# Altium PCB Finale.PcbDoc
Units mm, origin at the board's own origin, x right, y up, seen from the top; angles counter-clockwise.
Board outline 81.58 x 68.2 mm, 5 copper layers (Top Layer, 5V Plane, 12V Plane, Ground Plane, Bottom Layer), stack 1.005 mm thick; 66 components, 84 nets, 266 pads, 55 vias.
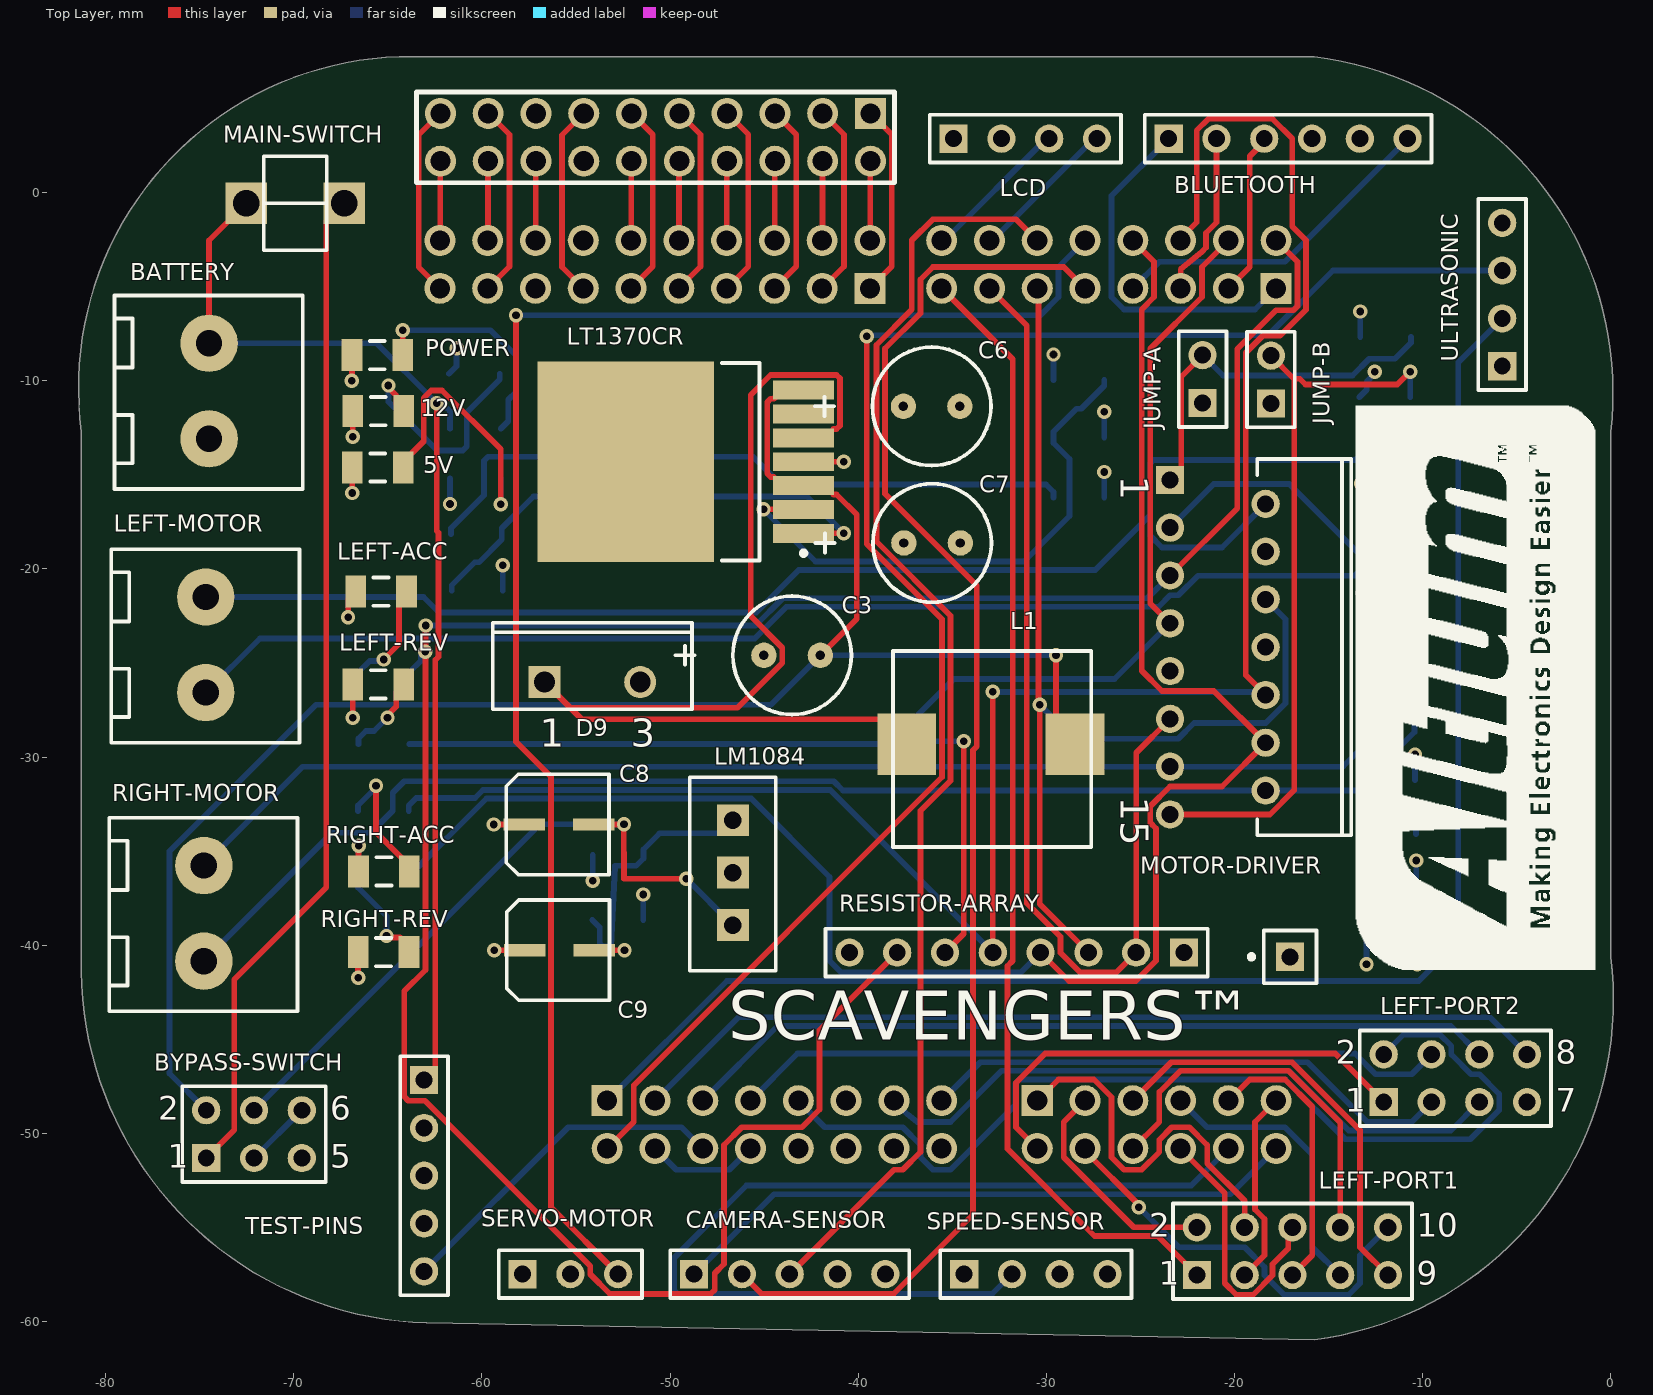
[diagram p0: Top Layer view]
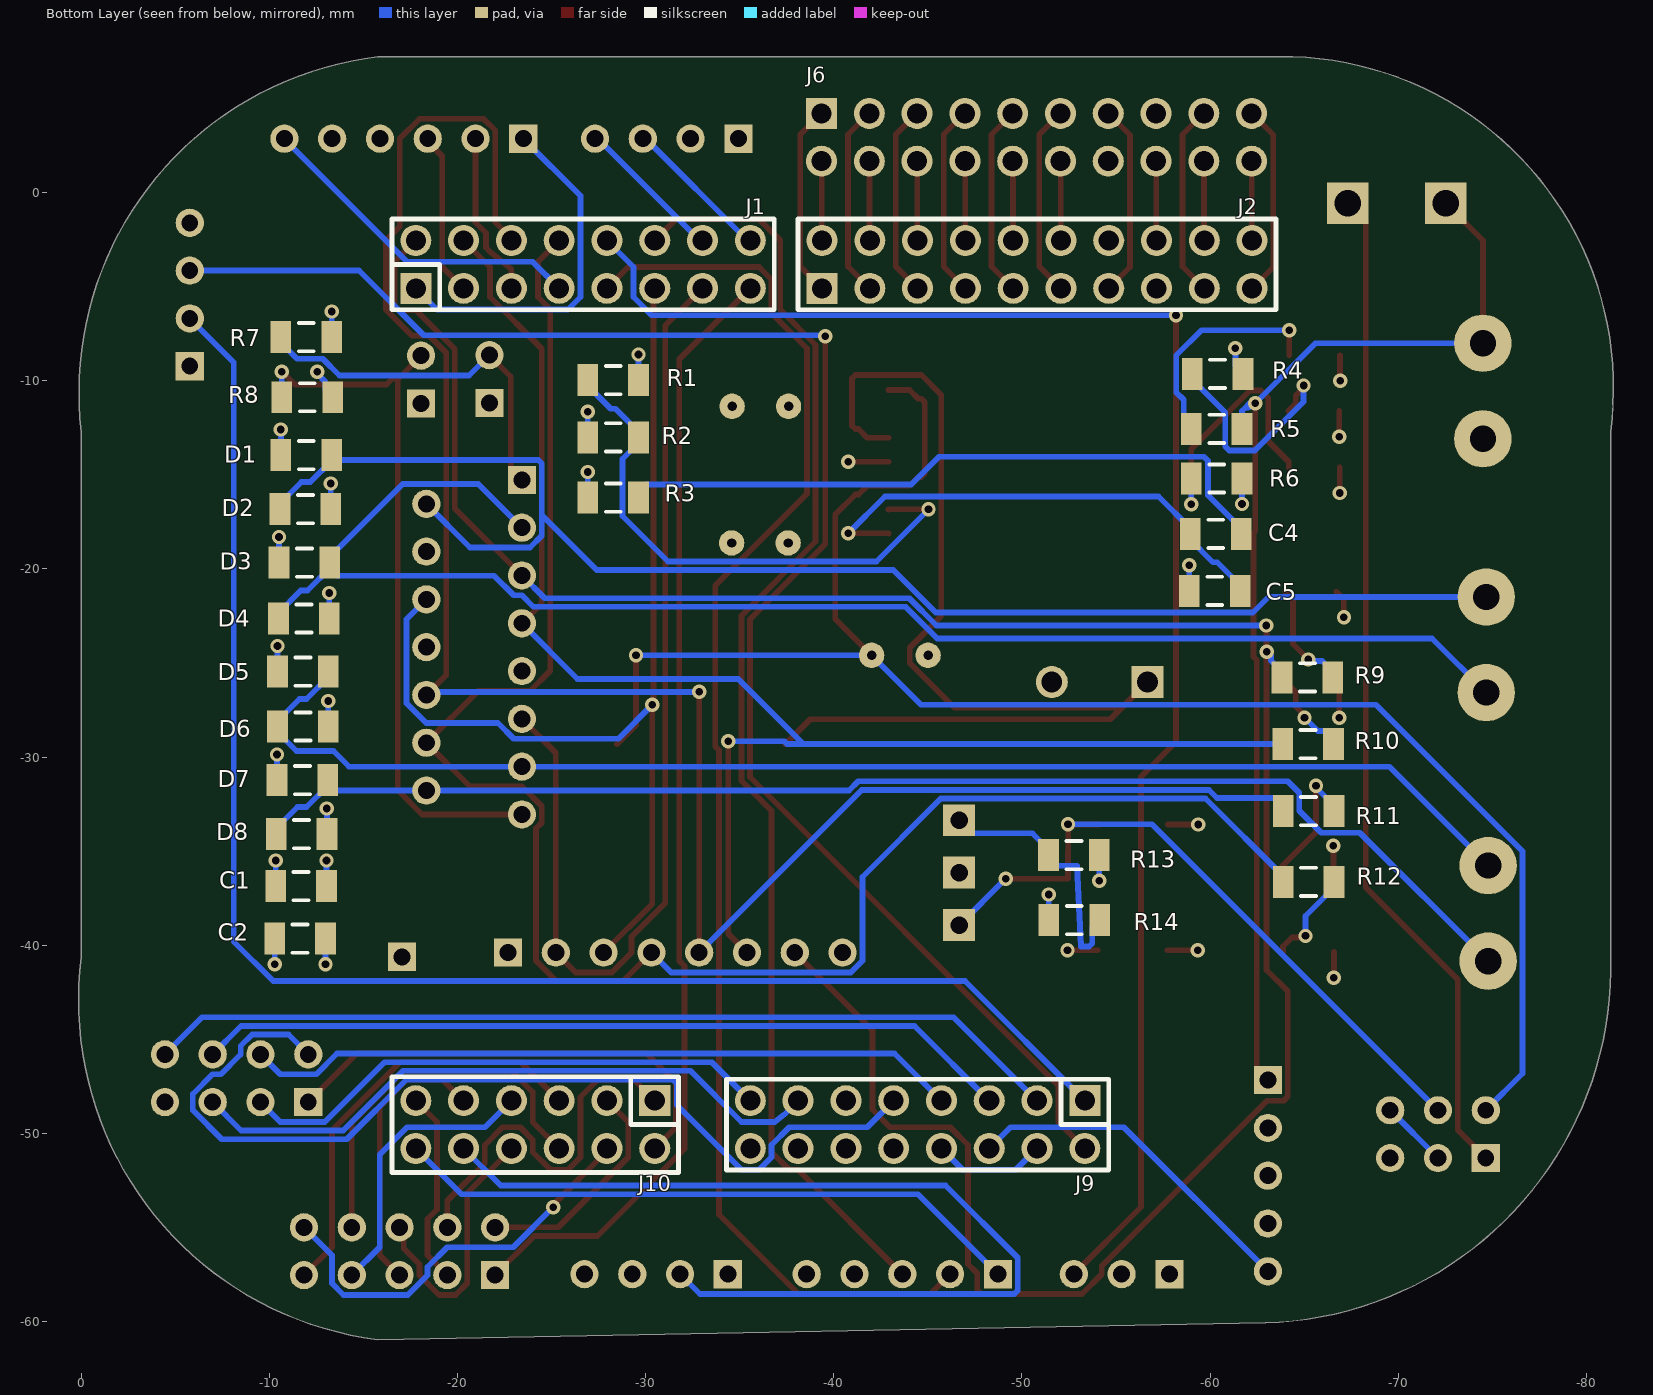
[diagram p1: Bottom Layer view, seen from below]
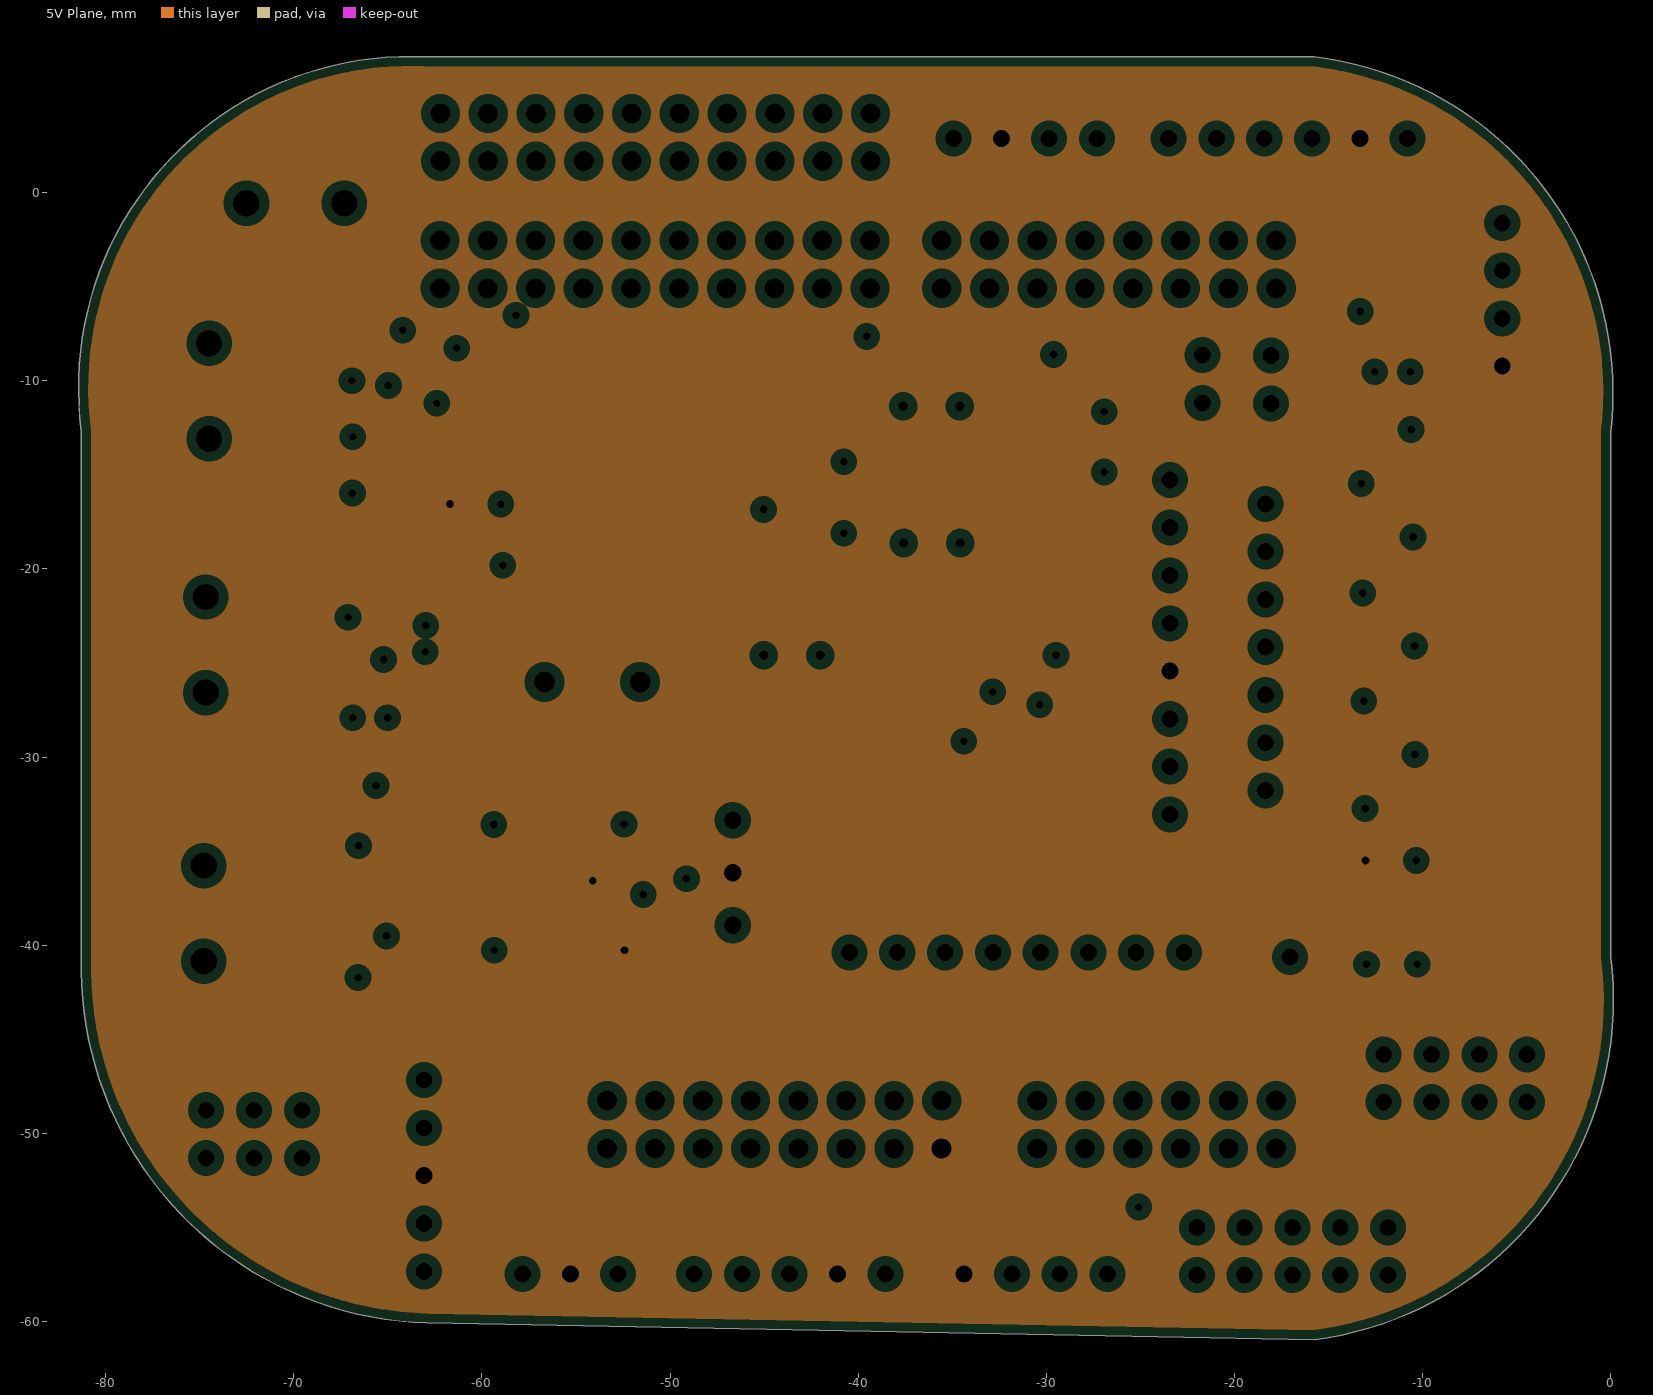
[diagram p2: 5V Plane, clearances drawn from the general rule]
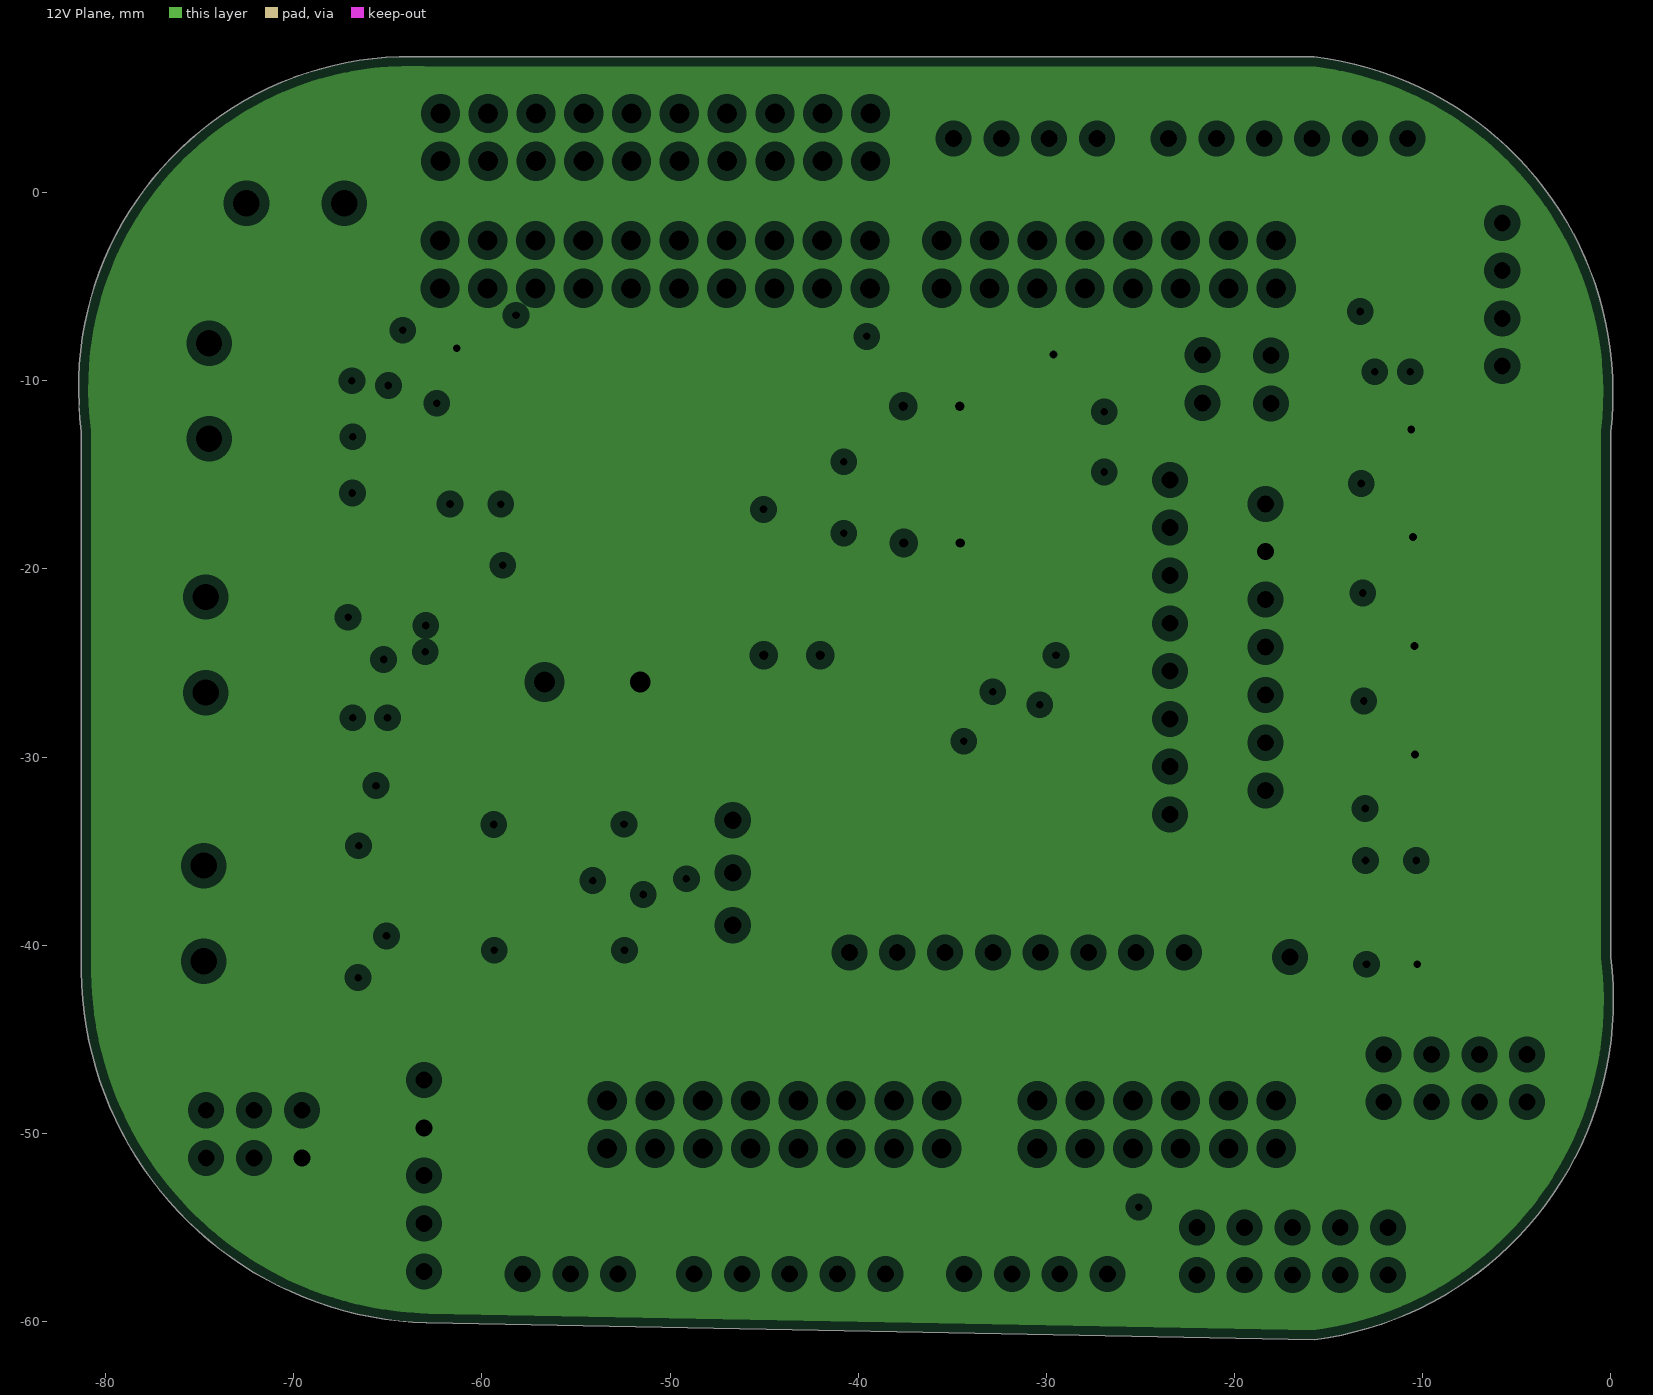
[diagram p3: 12V Plane, clearances drawn from the general rule]
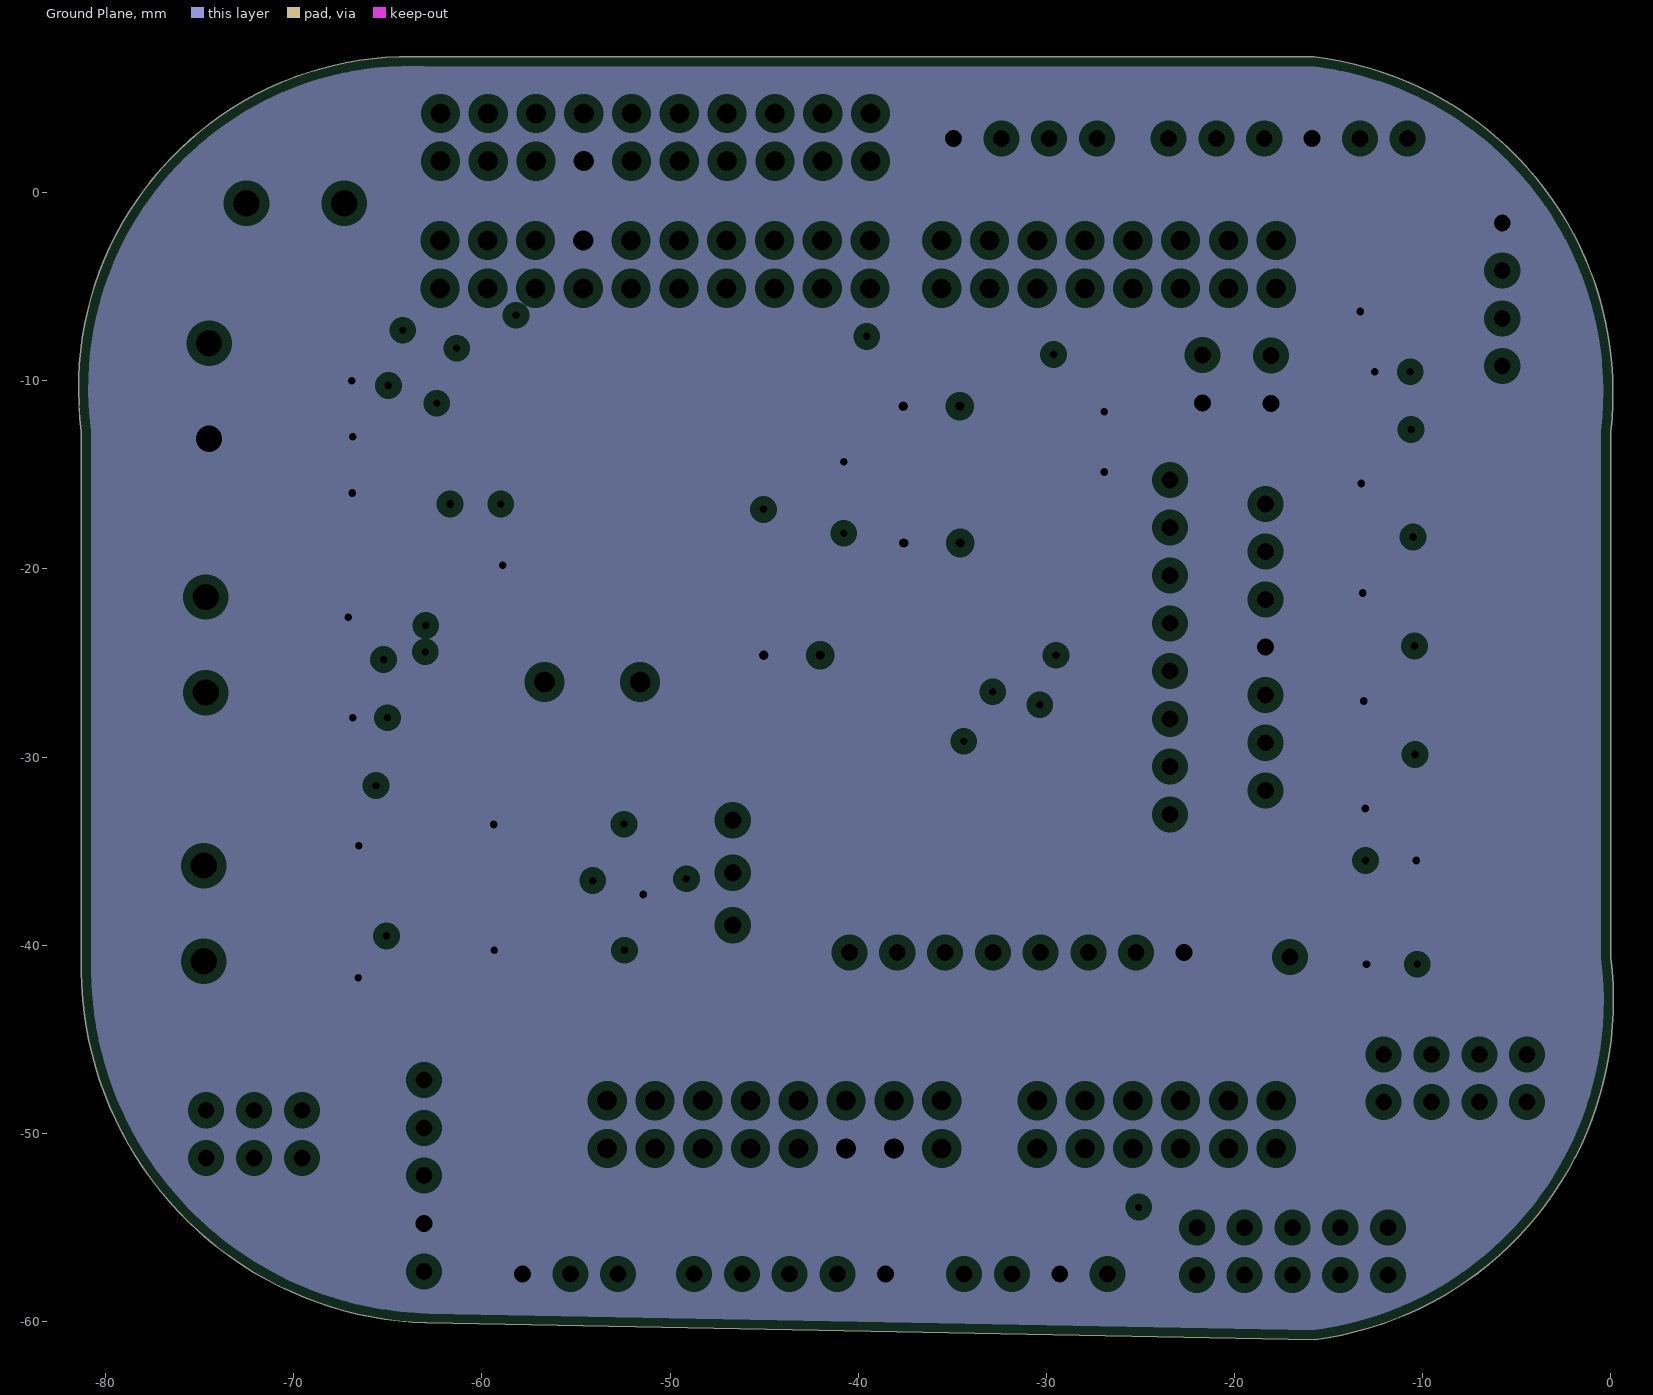
[diagram p4: Ground Plane, clearances drawn from the general rule]

## Layer stack, top to bottom
Top Solder: solder mask 0.0102, Solder Resist, Dk 3.5
Top Layer: signal copper 0.0356
Dielectric1: core 0.3175, FR-4, Dk 4.8
5V Plane: plane copper 0.036, net 5V
Dielectric 5: prepreg 0.127, Dk 4.2
12V Plane: plane copper 0.036, net 12V
Dielectric 6: core 0.254, Dk 4.2
Ground Plane: plane copper 0.036, net GND
Dielectric 4: prepreg 0.127, Dk 4.2
Bottom Layer: signal copper 0.0356
Bottom Solder: solder mask 0.0102, Solder Resist, Dk 3.5

## Board outline
-81.28,-40.64 ccw(c-62.395,-41.186) -62.942,-60.071 -15.753,-60.96 ccw(c-18.036,-42.924) 0,-40.64 0,-12.7 ccw(c-17.833,-10.619) -15.753,7.214 -25.121,7.214 -44.094,7.214 -62.942,7.214 ccw(c-63.837,-10.363) -81.28,-12.7

## Design rules (kind name [scope] priority, off if disabled: settings)
Clearance Polygon [(InNet('GND') AND InPoly)] p1: gap=0.254 ignorepadtopadclearanceinfootprint=FALSE except(0: Arc-Hole Track-Hole SMDPad-Hole THPad-Hole Via-Hole Fill-Hole Poly-Hole Region-Hole Text-Hole)
Clearance [All] p2: gap=0.152 ignorepadtopadclearanceinfootprint=FALSE
ComponentClearance [All] p1: gap=0 collisioncheckmode=3 verticalgap=0 showdistances=FALSE
Height [All] p1: minheight=0 maxheight=38.1 prefheight=12.7
HoleSize [All] p1: absolutevalues=TRUE maxlimit=6.35 minlimit=0.381 maxpercent=80.000 minpercent=20.000
HoleToHoleClearance [All] p1: gap=0.051 allowstackedmicrovias=TRUE
MinimumAnnularRing [All] p1: minimumring=0.178
MinimumSolderMaskSliver [All] p1: minsoldermaskwidth=0.178
PlaneClearance [All] p1: clearance=0.508
PlaneConnect [All] p1: planeconnectstyle=Direct reliefexpansion=0.508 reliefentries=4 reliefconductorwidth=0.254 reliefairgap=0.254
PolygonConnect PolygonConnect_1 [IsVia] p1: connectstyle=Direct reliefconductorwidth=0.254 reliefentries=4 polygonreliefangle="90 Angle" airgapwidth=0.254
PolygonConnect [All] p2: connectstyle=Relief reliefconductorwidth=0.254 reliefentries=4 polygonreliefangle="90 Angle" airgapwidth=0.254
RoomDefinition FinalPCB_Motor [InComponentClass('FinalPCB_Motor')] p1: confinementstyle=ConfineIn formatcopy=TRUE lockcomponents=FALSE outline -81.915,-63.398 1.372,-63.398 1.372,9.703 -81.915,9.703
RoomDefinition DC-DC [InComponentClass('DC-DC')] p2: confinementstyle=ConfineIn formatcopy=TRUE lockcomponents=FALSE outline -81.915,-63.652 1.549,-63.652 1.549,9.83 -81.915,9.83
RoomDefinition Connectors [InComponentClass('Connectors')] p3: confinementstyle=ConfineIn formatcopy=TRUE lockcomponents=FALSE outline -82.88,-65.43 4.191,-65.43 4.191,10.084 -82.88,10.084
RoutingVias [All] p1: holewidth=0.406 width=0.762 viastyle="Through Hole" minholewidth=0.381 minwidth=0.762 maxholewidth=1.27 maxwidth=2.54
ShortCircuit ShortCircuit_1 [HasFootprint('4-40 X 250') vs HasFootprint('4-40 X 250')] p1: allowed=TRUE
ShortCircuit [All] p2: allowed=FALSE
SilkToSilkClearance [All] p1: silktosilkclearance=0
SilkToSolderMaskClearance SilkscreenOverComponentPads [IsPad] p1: minsilkscreentomaskgap=0 clearancetoexposedcopper=TRUE
SolderMaskExpansion [All] p1: expansion=0.127
Width [All] p1: maxlimit=1.27 minlimit=0.254 preferedwidth=0.305
20 further rules are at their usual default settings.

## Classes and differential pairs
component class FinalPCB_Motor: Bluetooth C1 C2 "Camera sensor" CAMERA-SENSOR D1 D2 D3 D4 D5 D6 D7 D8 JUMP-A JUMP-B JumpA LCD "Left Motor" LEFT-ACC LEFT-MOTOR LEFT-REV "Motor Driver" MOTOR-DRIVER R7 R8 R9 R10 R11 R12 RESISTOR-ARRAY "Right Motor" "RIGHT REV" RIGHT-ACC RIGHT-MOTOR RIGHT-REV SCAVENGERS™ "Servo Motor" SERVO-MOTOR SPEED-SENSOR "Test PINS" TEST-PINS ULTRASONIC
component class DC-DC: 5V 12V Battery "Bypass Switch" BYPASS-SWITCH C3 C4 C5 C6 C7 C8 C9 D9 L1 LM1084 LT1370CR MAIN-SWITCH POWER R1 R2 R3 R4 R5 R6 R13 R14
component class Connectors: J1 J2 J6 J8 J9 J10 J12 LEFT-PORT1 LEFT-PORT2 R18

## Components (designator, comment, footprint, x,y, rotation, side; value= is the part's Value field where it differs from the comment)
5V "" C1206 -65.532,-14.605 r180 top
12V "" C1206 -65.507,-11.608 r180 top
BATTERY "" 282857-2 -74.498,-8.001 r180 top
BLUETOOTH "" HDR1X6 -23.495,2.87 r0 top (schematic designator Bluetooth)
BYPASS-SWITCH "SW-DPDT" HDR2X3 -74.651,-51.308 r0 top
C1 "0.1uF" C1206 -11.68,-36.855 r180 bottom
C2 "0.1uF" C1206 -11.629,-39.649 r180 bottom
C3 "22uF" PolarizedCap_22uF -42.009,-24.587 r180 top
C4 "0.047uF" C1206 -60.296,-18.136 r0 bottom
C5 "0.0047uF" C1206 -60.245,-21.158 r180 bottom
C6 "22uF" PolarizedCap_22uF -34.592,-11.354 r180 top
C7 "" PolarizedCap_22uF -34.567,-18.618 r180 top value=22uF
C8 "10uF" 10uF -55.905,-33.579 r180 top
C9 "10uF" 10uF -55.88,-40.259 r180 top
CAMERA-SENSOR "" HDR1X5 -48.717,-57.48 r0 top
D1 "" C1206 -11.96,-13.945 r0 bottom
D2 "" C1206 -11.913,-16.815 r0 bottom
D3 "" C1206 -11.858,-19.66 r0 bottom
D4 "" C1206 -11.833,-22.631 r0 bottom
D5 "" c1206 -11.782,-25.451 r0 bottom
D6 "" c1206 -11.782,-28.372 r0 bottom
D7 "" C1206 -11.756,-31.217 r0 bottom
D8 "" c1206 -11.706,-34.087 r0 bottom
D9 "" TO-220AC -54.127,-26.01 r0 top
J1 "67996-416HLF" 67996-416HLF -26.67,-3.81 r180 bottom locked
J2 "67996-420HLF" 67996-420HLF#1 -50.8,-3.81 r180 bottom locked
J6 "67996-420HLF" 67996-420HLF#2 -50.775,2.946 r0 bottom
J9 "67996-416HLF" 67996-416HLF -44.45,-49.53 r0 bottom locked
J10 "67996-412HLF" 67996-412HLF -24.13,-49.53 r0 bottom locked
JUMP-A "" HDR1X2 -21.692,-11.176 r90 top
JUMP-B "" HDR1X2 -18.059,-11.201 r90 top
L1 "10uH, 6.8A" Inductor10uH -32.944,-29.312 r180 top
LCD "" HDR1X4 -34.925,2.87 r0 top
LEFT-ACC "" C1206 -65.354,-21.209 r180 top
LEFT-MOTOR "" 282857-2 -74.676,-21.488 r180 top
LEFT-PORT1 "" HDR2X5 -21.996,-57.531 r0 top
LEFT-PORT2 "" HDR2X4 -12.065,-48.336 r0 top
LEFT-REV "" C1206 -65.507,-26.137 r180 top
LM1084 "" LM1084 -46.66,-33.354 r0 top
LT1370CR "" LT-R-7_N -49.149,-14.3 r180 top
MAIN-SWITCH "SW-SPST" Main_Switch-SPST -72.517,-0.559 r0 top
MOTOR-DRIVER "Motor Driver" Multiwatt15V -20.879,-24.155 r270 top
POWER "" C1206 -65.557,-8.636 r180 top
R1 "53.6K" C1206 -28.27,-9.957 r180 bottom
R2 "6.19K" C1206 -28.27,-13.005 r180 bottom
R3 "2K" C1206 -28.27,-16.205 r180 bottom
R4 "Res1" C1206 -60.397,-9.627 r180 bottom value=1k
R5 "Res1" C1206 -60.347,-12.548 r180 bottom value=1k
R6 "Res1" C1206 -60.347,-15.189 r180 bottom value=1k
R7 "0.2" C1206 -11.96,-7.671 r0 bottom
R8 "0.2" C1206 -12.01,-10.871 r0 bottom
R9 "1k" C1206 -65.173,-25.756 r180 bottom
R10 "1k" C1206 -65.206,-29.312 r180 bottom
R11 "1k" C1206 -65.231,-32.868 r180 bottom
R12 "1k" C1206 -65.231,-36.627 r180 bottom
R13 "" C1206 -52.756,-35.204 r180 bottom value=121
R14 "" C1206 -52.777,-38.659 r180 bottom value=365
RESISTOR-ARRAY "1k(8 pins)" HDR1X8 -22.682,-40.386 r180 top
RIGHT-ACC "" C1206 -65.202,-36.068 r180 top
RIGHT-MOTOR "" 282857-2 -74.778,-35.763 r180 top
RIGHT-REV "" C1206 -65.227,-40.361 r180 top
SCAVENGERS™ "" PIN1 -17.043,-40.615 r90 top
SERVO-MOTOR "" HDR1X3 -57.836,-57.48 r0 top
SPEED-SENSOR "" HDR1X4 -34.366,-57.48 r0 top
TEST-PINS "" HDR1X5 -63.068,-47.168 r270 top
ULTRASONIC "" HDR1X4 -5.766,-9.22 r90 top

## Footprints (in the part's own frame and the unit in brackets; to place one, negate y for a bottom-side part, rotate by r counter-clockwise, add the part's x,y. Pads: shape width x height; smd on the part's side, far side on the other; paste and mask are expansions set on the pad)
10uF [mm]
  rect 2.2x0.66 smd: 1(-1.85,0) 2(1.85,0)
  silkscreen extent -2.67,-2.67 2.79,2.67
67996-412HLF [mil] "CONN HEADER 12POS .100 STR TIN"
  rect 65x65 hole 42: 1(-250,-50)
  round 65 hole 42: 2(-250,50) 3(-150,-50) 4(-150,50) 5(-50,-50) 6(-50,50) 7(50,-50) 8(50,50) 9(150,-50) 10(150,50) 11(250,-50) 12(250,50)
  silkscreen extent -300,-100 300,100, body extent -300,-100 300,100, height 331
67996-416HLF [mil] "CONN HEADER 16POS .100 STR TIN"
  rect 65x65 hole 42: 1(-350,-50)
  round 65 hole 42: 2(-350,50) 3(-250,-50) 4(-250,50) 5(-150,-50) 6(-150,50) 7(-50,-50) 8(-50,50) 9(50,-50) 10(50,50) 11(150,-50) 12(150,50) 13(250,-50) 14(250,50) 15(350,-50) 16(350,50)
  silkscreen extent -400,-95 400,95, body extent -400,-95 400,95, height 305
67996-420HLF#1 [mil] "CONN HEADER 20POS .100 STR TIN"
  rect 65x65 hole 42: 1(-450,-50)
  round 65 hole 42: 2(-450,50) 3(-350,-50) 4(-350,50) 5(-250,-50) 6(-250,50) 7(-150,-50) 8(-150,50) 9(-50,-50) 10(-50,50) 11(50,-50) 12(50,50) 13(150,-50) 14(150,50) 15(250,-50) 16(250,50) 17(350,-50) 18(350,50) 19(450,-50) 20(450,50)
  silkscreen extent -500,-95 500,95, body extent -500,-95 500,95, height 305
67996-420HLF#2 [mil] "CONN 20 PIN 0.100 IN"
  rect 65x65 hole 42: 1(450,-50)
  round 65 hole 42: 2(450,50) 3(350,-50) 4(350,50) 5(250,-50) 6(250,50) 7(150,-50) 8(150,50) 9(50,-50) 10(50,50) 11(-50,-50) 12(-50,50) 13(-150,-50) 14(-150,50) 15(-250,-50) 16(-250,50) 17(-350,-50) 18(-350,50) 19(-450,-50) 20(-450,50)
  body extent -500,-95 500,95, height 305
282857-2 [mil] "TE CONNECTIVITY / BUCHANAN  282857-2  Wire-To-Board Terminal Block, 2, 300 V, 24 A, 30 AWG, 12 AWG, 3 mm²"
  round 120 hole 55: 1(0,0) 2(0,200)
  silkscreen extent -196,-100 198,305, body extent -196,-100 198,320, height 752
C1206 [mm] "Chip Capacitor, Body 3.2x1.6mm, IPC High Density"
  rect 1.1x1.7 smd: 1(-1.35,0) 2(1.35,0)
  silkscreen extent -0.4,-0.75 0.4,0.75, body extent -1.7,-0.9 1.7,0.9, height 1.3
c1206 [mm] "Chip Capacitor, Body 3.2x1.6mm, IPC High Density"
  rect 1.1x1.7 smd: 1(-1.35,0) 2(1.35,0)
  silkscreen extent -0.4,-0.75 0.4,0.75, body extent -1.7,-0.9 1.7,0.9, height 1.3
HDR1X2 [mm] "Connector; Header; 2 Position"
  rect 1.5x1.5 hole 0.9: 1(0,0)
  round 1.5 hole 0.9: 2(2.54,0)
  silkscreen extent -1.27,-1.27 3.81,1.27
HDR1X3 [mm] "Connector; Header; 3 Position"
  rect 1.5x1.5 hole 0.9: 1(0,0)
  round 1.5 hole 0.9: 2(2.54,0) 3(5.08,0)
  silkscreen extent -1.27,-1.27 6.35,1.27
HDR1X4 [mm] "Connector; Header; 4 Position"
  rect 1.5x1.5 hole 0.9: 1(0,0)
  round 1.5 hole 0.9: 2(2.54,0) 3(5.08,0) 4(7.62,0)
  silkscreen extent -1.27,-1.27 8.89,1.27
HDR1X5 [mm] "Connector; Header; 5 Position"
  rect 1.5x1.5 hole 0.9: 1(0,0)
  round 1.5 hole 0.9: 2(2.54,0) 3(5.08,0) 4(7.62,0) 5(10.16,0)
  silkscreen extent -1.27,-1.27 11.43,1.27
HDR1X6 [mm] "Connector; Header; 6 Position"
  rect 1.5x1.5 hole 0.9: 1(0,0)
  round 1.5 hole 0.9: 2(2.54,0) 3(5.08,0) 4(7.62,0) 5(10.16,0) 6(12.7,0)
  silkscreen extent -1.27,-1.27 13.97,1.27
HDR1X8 [mm] "Connector; Header; 8 Position"
  rect 1.5x1.5 hole 0.9: 1(0,0)
  round 1.5 hole 0.9: 2(2.54,0) 3(5.08,0) 4(7.62,0) 5(10.16,0) 6(12.7,0) 7(15.24,0) 8(17.78,0)
  silkscreen extent -1.27,-1.27 19.05,1.27
HDR2X3 [mm] "Connector; Header; 3x2 Position"
  rect 1.5x1.5 hole 0.9: 1(0,0)
  round 1.5 hole 0.9: 2(0,2.54) 3(2.54,0) 4(2.54,2.54) 5(5.08,0) 6(5.08,2.54)
  silkscreen extent -1.27,-1.27 6.35,3.81
HDR2X4 [mm] "Connector; Header; 4x2 Position"
  rect 1.5x1.5 hole 0.9: 1(0,0)
  round 1.5 hole 0.9: 2(0,2.54) 3(2.54,0) 4(2.54,2.54) 5(5.08,0) 6(5.08,2.54) 7(7.62,0) 8(7.62,2.54)
  silkscreen extent -1.27,-1.27 8.89,3.81
HDR2X5 [mm] "Connector; Header; 5x2 Position"
  rect 1.5x1.5 hole 0.9: 1(0,0)
  round 1.5 hole 0.9: 2(0,2.54) 3(2.54,0) 4(2.54,2.54) 5(5.08,0) 6(5.08,2.54) 7(7.62,0) 8(7.62,2.54) 9(10.16,0) 10(10.16,2.54)
  silkscreen extent -1.27,-1.27 11.43,3.81
Inductor10uH [mm]
  rect 3.124x3.251 smd: 1(-4.47,0) 2(4.471,0)
  silkscreen extent -5.33,-4.95 5.21,5.46
LM1084 [mm]
  rect 1.7x1.7 hole 0.94: 1(0,0) 2(0,-2.79) 3(0,-5.58)
  silkscreen extent -2.29,-8 2.29,2.29
LT-R-7_N [mm] "DPAK, 7-Leads, Body 10.224x8.89mm, Pitch 1.27mm, IPC Medium Density"
  rect 3.25x1 smd: 1(-6.25,3.81) 2(-6.25,2.54) 3(-6.25,1.27) 4(-6.25,0) 5(-6.25,-1.27) 6(-6.25,-2.54) 7(-6.25,-3.81)
  rect 9.4x10.65 smd: 8(3.2,0)
  silkscreen extent -6.38,-5.25 -1.9,5.25, body extent -3.9,-5.28 5.5,5.28, height 4.58
Main_Switch-SPST [mm]
  rect 2.2x2.2 hole 1.42: 1(0,0) 2(5.2,0)
  silkscreen extent 0.93,-2.5 4.28,2.5
Multiwatt15V [mm] "TO, Thru-Hole, Vertical, Heatsink Mounted; 15 Bent Staggered Leads; Pitch 1.27 mm"
  rect 1.5x1.5 hole 0.9: 1(-8.89,-2.54)
  round 1.5 hole 0.9: 2(-7.62,2.54) 3(-6.35,-2.54) 4(-5.08,2.54) 5(-3.81,-2.54) 6(-2.54,2.54) 7(-1.27,-2.54) 8(0,2.54) 9(1.27,-2.54) 10(2.54,2.54) 11(3.81,-2.54) 12(5.08,2.54) 13(6.35,-2.54) 14(7.62,2.54) 15(8.89,-2.54)
  silkscreen extent -10,2.09 10,7.09
PIN1 [mm] "Connector; Plug"
  rect 1.5x1.5 hole 0.9: 1(0,0)
  silkscreen extent -1.4,-1.4 1.4,2.17
PolarizedCap_22uF [mm]
  round 1.35 hole 0.5: 1(0,0) 2(3,0)
  silkscreen extent -1.65,-3.15 7.7,3.15
TO-220AC [mm] "TO, Thru-Hole, Vertical, Heatsink Mounted; 3 In-Line Leads (1 Absent); Pitch 2.54 mm"
  rect 1.7x1.7 hole 1.1: 1(-2.54,0)
  round 1.7 hole 1.1: 3(2.54,0)
  silkscreen extent -5.3,-1.45 5.3,3.15

## Part data
5V 12V POWER: library part LED0, "Typical INFRARED GaAs LED", Supplier Part Number 1=630-HSMC-C150, LatestRevisionDate=08-Jul-2005, LatestRevisionNote="Mech Layer 1 removed.", PackageDescription="LED; 2 Leads", PackageReference=LED-0, Published=8-Jun-2000, Publisher="Altium Limited", Supplier 1=Mouser
BATTERY LEFT-MOTOR RIGHT-MOTOR: library part 282857-2, Supplier Part Number 1=571-282857-2, Supplier 1=Mouser
BLUETOOTH: library part "Header 6", "Header, 6-Pin", Supplier Part Number 1=798-A4B-6PA-2DSA(71), LatestRevisionDate=17-Jul-2002, LatestRevisionNote="Re-released for DXP Platform.", Publisher="Altium Limited", Supplier 1=Mouser
BYPASS-SWITCH: "Double-Pole, Double-Throw Switch", Supplier Part Number 1=855-M52-5110345, LatestRevisionDate=17-Jul-2002, LatestRevisionNote="Re-released for DXP Platform.", PackageDescription="Switch; 6 Leads", PackageReference=DPDT-6, Published=24-Mar-1999, Publisher="Altium Limited", Supplier 1=Mouser
C1 C2: library part Cap, "Capacitor", Supplier Part Number 1=81-GRM426X104K50D, LatestRevisionDate=17-Jul-2002, LatestRevisionNote="Re-released for DXP Platform.", PackageDescription="Radial Cap, Thru-Hole; 2 Leads; 0.3 in Pin Spacing", PackageReference=RAD-0.3, Published=8-Jun-2000, Publisher="Altium Limited", Supplier 1=Mouser
C3 C6 C7: library part "Cap Pol3", "Polarized Capacitor (Surface Mount)", Supplier Part Number 1=667-ECE-A1EKS220, LatestRevisionDate=29-May-2009, LatestRevisionNote="IPC-7351 Footprint Added.", PackageDescription="Chip Capacitor", PackageReference=C0805, Published=8-Jun-2000, Publisher="Altium Limited", Supplier 1=Mouser, Supplier 2=Mouser, Supplier Part Number 2=667-ECE-A1EKS220B
C4: library part Cap, "Capacitor", Supplier Part Number 1=80-C1206C473J3R, LatestRevisionDate=17-Jul-2002, LatestRevisionNote="Re-released for DXP Platform.", PackageDescription="Radial Cap, Thru-Hole; 2 Leads; 0.3 in Pin Spacing", PackageReference=RAD-0.3, Published=8-Jun-2000, Publisher="Altium Limited", Supplier 1=Mouser
C5: library part Cap, "Capacitor", Supplier Part Number 1=77-VJ1206A472GXXCBC, LatestRevisionDate=17-Jul-2002, LatestRevisionNote="Re-released for DXP Platform.", PackageDescription="Radial Cap, Thru-Hole; 2 Leads; 0.3 in Pin Spacing", PackageReference=RAD-0.3, Published=8-Jun-2000, Publisher="Altium Limited", Supplier 1=Mouser
C8 C9: library part "Cap Pol3", "Polarized Capacitor (Surface Mount)", Supplier Part Number 1=667-EEE-1EA100SR, LatestRevisionDate=29-May-2009, LatestRevisionNote="IPC-7351 Footprint Added.", PackageDescription="Chip Capacitor", PackageReference=C0805, Published=8-Jun-2000, Publisher="Altium Limited", Supplier 1=Mouser
CAMERA-SENSOR: library part "Header 5", "Header, 5-Pin", Supplier Part Number 1=798-A4B-5PA-2DSA(71), LatestRevisionDate=17-Jul-2002, LatestRevisionNote="Re-released for DXP Platform.", Publisher="Altium Limited", Supplier 1=Mouser
D1 D2 D3 D4 D5 D6 D7 D8: library part "Diode 1N4004", "1 Amp General Purpose Rectifier", Supplier Part Number 1=750-CURN101-HF, Code_JEDEC=DO-204-AL, ComponentLink1Description="Manufacturer Link", ComponentLink1URL=http://www.fairchildsemi.com/, ComponentLink2Description=Datasheet, ComponentLink2URL=http://www.fairchildsemi.com/ds/1N%2F1N4001.pdf, DatasheetVersion=1998, LatestRevisionDate=17-Jul-2002, LatestRevisionNote="Re-released for DXP Platform.", PackageDescription="Diode, Axial; Body 5.2 x 2.7 mm (LxDia. max), Lead Dia. 0.86 mm (max)", PackageReference=DO-41, PackageVersion=Aug-1999, Published=8-Jun-2000, Publisher="Altium Limited", Supplier 1=Mouser
D9: library part "D Schottky", "Schottky Diode", Supplier Part Number 1=755-SCS210KGHRC, Code_JEDEC=DO-214-AA, LatestRevisionDate=17-Jul-2002, LatestRevisionNote="Re-released for DXP Platform.", PackageDescription="DO-214-AA/SMB; 2 C-Bend Leads; Body 5.3 x 3.6 mm, inc. leads (LxW)", PackageReference=SMB, Published=8-Jun-2000, Publisher="Altium Limited", Supplier 1=Mouser
J1 J9: "CONN HEADER 16POS .100 STR TIN", Color=Black, Manufacturer=FCI, Category="Connectors, Interconnects", ComponentLink1Description=http://portal.fciconnect.com/Comergent//fci/drawing/67996.pdf, ComponentLink1URL=http://portal.fciconnect.com/Comergent//fci/drawing/67996.pdf, Connector Type="Header, Unshrouded", Contact Finish=Tin, Contact Finish Thickness="100µin (2.54µm)", Contact Mating Length="0.230\" (5.84mm)", Contact Type="Male Pin", Fastening Type=-, Features=-, Manufacturer Part Number=67996-416HLF, Mounting Type="Through Hole", Number of Positions=16, Number of Positions Loaded=All, Number of Rows=2, Packaging=Bulk, Pitch="0.100\" (2.54mm)", Pricing 1="1=0.56, 10=0.521, 25=0.4684, 50=0.4164, 100=0.3991, 250=0.36436, 500=0.347, 1000=0.28628, 2500=0.26025 (USD)", RoHS="RoHS Compliant", Row Spacing="0.100\" (2.54mm)", Stock 1=1589, Supplier 2=Mouser, Supplier Part Number 2=649-67996-416HLF, Termination=Solder
J2: "CONN HEADER 20POS .100 STR TIN", Color=Black, Manufacturer=FCI, Category="Connectors, Interconnects", ComponentLink1Description=http://portal.fciconnect.com/Comergent//fci/drawing/67996.pdf, ComponentLink1URL=http://portal.fciconnect.com/Comergent//fci/drawing/67996.pdf, Connector Type="Header, Unshrouded", Contact Finish=Tin, Contact Finish Thickness="100µin (2.54µm)", Contact Mating Length="0.230\" (5.84mm)", Contact Type="Male Pin", Fastening Type=-, Features=-, Manufacturer Part Number=67996-420HLF, Mounting Type="Through Hole", Number of Positions=20, Number of Positions Loaded=All, Number of Rows=2, Packaging=Bulk, Pitch="0.100\" (2.54mm)", Pricing 1="1=0.66, 10=0.619, 25=0.5572, 50=0.4952, 100=0.4745, 250=0.43324, 500=0.4126, 1000=0.3404, 2500=0.30945 (USD)", RoHS="RoHS Compliant", Row Spacing="0.100\" (2.54mm)", Stock 1=596, Supplier 2=Mouser, Supplier Part Number 2=649-67996-420HLF, Termination=Solder
J6: "CONN HEADER 20POS .100 STR TIN", Supplier 2=Mouser, Supplier Part Number 2=649-67996-420HLF
J10: "CONN HEADER 12POS .100 STR TIN", Color=Black, Manufacturer=FCI, Category="Connectors, Interconnects", ComponentLink1Description=http://portal.fciconnect.com/Comergent//fci/drawing/67996.pdf, ComponentLink1URL=http://portal.fciconnect.com/Comergent//fci/drawing/67996.pdf, Connector Type="Header, Unshrouded", Contact Finish=Tin, Contact Finish Thickness="100µin (2.54µm)", Contact Mating Length="0.230\" (5.84mm)", Contact Type="Male Pin", Fastening Type=-, Features=-, Manufacturer Part Number=67996-412HLF, Mounting Type="Through Hole", Number of Positions=12, Number of Positions Loaded=All, Number of Rows=2, Packaging=Bulk, Pitch="0.100\" (2.54mm)", Pricing 1="1=0.4, 10=0.379, 25=0.3248, 50=0.276, 100=0.2651, 250=0.23804, 500=0.22722, 1000=0.18935, 2500=0.17312 (USD)", RoHS="RoHS Compliant", Row Spacing="0.100\" (2.54mm)", Stock 1=1044, Supplier 2=Mouser, Supplier Part Number 2=649-67996-412HLF, Termination=Solder
JUMP-A JUMP-B: library part "Header 2", "Header, 2-Pin", Supplier Part Number 1=798-A4B-2PA-2DSA(71), LatestRevisionDate=17-Jul-2002, LatestRevisionNote="Re-released for DXP Platform.", Publisher="Altium Limited", Supplier 1=Mouser
L1: library part Inductor, "Inductor", Supplier Part Number 1=70-IHLP4040DZER100M0, Code_IEC=1005, Code_JEITA=0402, LatestRevisionDate=29-May-2009, LatestRevisionNote="IPC-7351 Footprint Added.", PackageDescription="Chip Inductor", PackageReference=0402-A, Published=8-Jun-2000, Publisher="Altium Limited", Supplier 1=Mouser
LCD SPEED-SENSOR ULTRASONIC: library part "Header 4", "Header, 4-Pin", Supplier Part Number 1=798-A4B-4PA-2DSA(71), LatestRevisionDate=17-Jul-2002, LatestRevisionNote="Re-released for DXP Platform.", Publisher="Altium Limited", Supplier 1=Mouser
LEFT-ACC RIGHT-ACC: library part LED1, "Typical RED GaAs LED", LatestRevisionDate=08-Jul-2005, LatestRevisionNote="Mech Layer 1 removed.", PackageDescription="LED; 2 Leads", PackageReference=LED-1, Published=8-Jun-2000, Publisher="Altium Limited", Supplier 2=Mouser, Supplier Part Number 2=630-HSMG-C150
LEFT-PORT1: library part "Header 5X2", "Header, 5-Pin, Dual row", Supplier Part Number 1=649-65846-010LF, LatestRevisionDate=17-Jul-2002, LatestRevisionNote="Re-released for DXP Platform.", Publisher="Altium Limited", Supplier 1=Mouser
LEFT-PORT2: library part "Header 4X2", "Header, 4-Pin, Dual row", Supplier Part Number 1=538-79107-7001, LatestRevisionDate=17-Jul-2002, LatestRevisionNote="Re-released for DXP Platform.", Publisher="Altium Limited", Supplier 1=Mouser
LEFT-REV RIGHT-REV: library part LED1, "Typical RED GaAs LED", Supplier Part Number 1=630-HSMY-C150, LatestRevisionDate=08-Jul-2005, LatestRevisionNote="Mech Layer 1 removed.", PackageDescription="LED; 2 Leads", PackageReference=LED-1, Published=8-Jun-2000, Publisher="Altium Limited", Supplier 1=Mouser
LM1084: library part LT1084CKK, "5-Amp Low-Dropout, Adjustable Positive Regulator", Supplier Part Number 1=926-LM1084IT50NOPB, ComponentLink1Description="Manufacturer Link", ComponentLink1URL=http://www.ti.com/, DatasheetVersion=Jan-1989, PackageDescription="SIP with Mounting Hole; 3 Leads; Body 22 x 16 x 5 mm (typ); Pitch 5.08 mm", PackageReference=KK003, PackageVersion=1989, Published=15-Apr-2002, Publisher="Altium Limited", Supplier 1=Mouser
LT1370CR: library part LT1370CR, "500 kHz High Efficiency 6 A Switching Regulator, 7-pin DPAK (R-7), 0 to 125 degC", Frequency Sync Range="600kHz - 800kHz", Manufacturer="Linear Technology", Supplier Part Number 1=LT1370CR-ND, ComponentLink1Description="Manufacturer URL", ComponentLink1URL=http://www.linear.com/, ComponentLink2Description=Datasheet, ComponentLink2URL=http://cds.linear.com/docs/en/datasheet/1370fs.pdf, ComponentLink3Description="Package Specification", ComponentLink3URL=http://cds.linear.com/docs/en/packaging/05081462_F_R.pdf, Mounting Technology="Surface Mount", Number of Outputs=1, PackageDescription="7-Pin Plastic DD Pak, Body 10.2235 x 8.89 mm, Pitch 1.27 mm", PackageReference=R-7, PackageVersion="Rev. F, 05/2012", PartNumber=LT1370CR, RoHS=FALSE, Supplier 1=Digi-Key
MAIN-SWITCH: "Single-Pole, Single-Throw Switch", Supplier Part Number 1=1055-TA1320B-EVX, LatestRevisionDate=17-Jul-2002, LatestRevisionNote="Re-released for DXP Platform.", PackageDescription="Switch; 2 Leads", PackageReference=SPST-2, Published=24-Mar-1999, Publisher="Altium Limited", Supplier 1=Mouser
MOTOR-DRIVER: library part L298N, "Dual Full Bridge Driver", Supplier Part Number 1=511-L298, ComponentLink1Description="Manufacturer Link", ComponentLink1URL=http://www.st.com/, ComponentLink2Description=Datasheet, ComponentLink2URL=http://www.st.com/stonline/products/literature/ds/1773/l298.pdf, DatasheetVersion=Jul-1999, LatestRevisionDate=14-May-2007, LatestRevisionNote="Mapped to vertical PCB.", PackageDescription="TO, Thru-Hole, Vertical, Heatsink Mounted; 15 Bent Staggered Leads; Pitch 1.27 mm", PackageReference=Multiwatt15V, Published=8-Jun-2000, Publisher="Altium Limited", Supplier 1=Mouser, Supplier 2=Mouser, Supplier 3=Mouser, Supplier 4=Mouser, Supplier Part Number 2=532-529802B25G, Supplier Part Number 3=571-87984-8, Supplier Part Number 4=571-87984-7
R1: library part Res1, "Resistor", Supplier Part Number 1=667-ERJ-8ENF5362V, LatestRevisionDate=17-Jul-2002, LatestRevisionNote="Re-released for DXP Platform.", PackageDescription="Axial Device, Thru-Hole; 2 Leads; 0.3 in Pin Spacing", PackageReference=AXIAL-0.3, Published=8-Jun-2000, Publisher="Altium Limited", Supplier 1=Mouser
R2: library part Res1, "Resistor", Supplier Part Number 1=652-CR1206FX-6191ELF, LatestRevisionDate=17-Jul-2002, LatestRevisionNote="Re-released for DXP Platform.", PackageDescription="Axial Device, Thru-Hole; 2 Leads; 0.3 in Pin Spacing", PackageReference=AXIAL-0.3, Published=8-Jun-2000, Publisher="Altium Limited", Supplier 1=Mouser
R3: library part Res1, "Resistor", Supplier Part Number 1=71-CRCW12062K00FKEAH, LatestRevisionDate=17-Jul-2002, LatestRevisionNote="Re-released for DXP Platform.", PackageDescription="Axial Device, Thru-Hole; 2 Leads; 0.3 in Pin Spacing", PackageReference=AXIAL-0.3, Published=8-Jun-2000, Publisher="Altium Limited", Supplier 1=Mouser
R4 R5 R6: "Resistor", Supplier Part Number 1=71-RCG12061K00JNEA, LatestRevisionDate=17-Jul-2002, LatestRevisionNote="Re-released for DXP Platform.", PackageDescription="Axial Device, Thru-Hole; 2 Leads; 0.3 in Pin Spacing", PackageReference=AXIAL-0.3, Published=8-Jun-2000, Publisher="Altium Limited", Supplier 1=Mouser
R7: library part Res1, "Resistor", Power Rating=30W, Supplier Part Number 1=71-WSL1206R2000FEA, LatestRevisionDate=17-Jul-2002, LatestRevisionNote="Re-released for DXP Platform.", PackageDescription="Axial Device, Thru-Hole; 2 Leads; 0.3 in Pin Spacing", PackageReference=AXIAL-0.3, Published=8-Jun-2000, Publisher="Altium Limited", Supplier 1=Mouser
R8: library part Res1, "Resistor", Supplier Part Number 1=71-WSL1206R2000FEA, LatestRevisionDate=17-Jul-2002, LatestRevisionNote="Re-released for DXP Platform.", PackageDescription="Axial Device, Thru-Hole; 2 Leads; 0.3 in Pin Spacing", PackageReference=AXIAL-0.3, Published=8-Jun-2000, Publisher="Altium Limited", Supplier 1=Mouser
R9 R10 R11 R12: library part Res1, "Resistor", Supplier Part Number 1=71-RCG12061K00JNEA, LatestRevisionDate=17-Jul-2002, LatestRevisionNote="Re-released for DXP Platform.", PackageDescription="Axial Device, Thru-Hole; 2 Leads; 0.3 in Pin Spacing", PackageReference=AXIAL-0.3, Published=8-Jun-2000, Publisher="Altium Limited", Supplier 1=Mouser
R13: library part Res1, "Resistor", Supplier Part Number 1=71-CRCW1206-121-E3, LatestRevisionDate=17-Jul-2002, LatestRevisionNote="Re-released for DXP Platform.", PackageDescription="Axial Device, Thru-Hole; 2 Leads; 0.3 in Pin Spacing", PackageReference=AXIAL-0.3, Published=8-Jun-2000, Publisher="Altium Limited", Supplier 1=Mouser
R14: library part Res1, "Resistor", Supplier Part Number 1=71-CRCW1206-365-E3, LatestRevisionDate=17-Jul-2002, LatestRevisionNote="Re-released for DXP Platform.", PackageDescription="Axial Device, Thru-Hole; 2 Leads; 0.3 in Pin Spacing", PackageReference=AXIAL-0.3, Published=8-Jun-2000, Publisher="Altium Limited", Supplier 1=Mouser
RESISTOR-ARRAY: library part "Header 8", "Header, 8-Pin", Supplier Part Number 1=71-CSC08A01-1.0K, LatestRevisionDate=17-Jul-2002, LatestRevisionNote="Re-released for DXP Platform.", Publisher="Altium Limited", Supplier 1=Mouser, Supplier 2=Mouser, Supplier Part Number 2=571-87984-8
SCAVENGERS™: library part Socket, "Socket", LatestRevisionDate=17-Jul-2002, LatestRevisionNote="Re-released for DXP Platform.", Publisher="Altium Limited"
SERVO-MOTOR: library part "Header 3", "Header, 3-Pin", Supplier Part Number 1=798-A4B-3PA-2DSA(71), LatestRevisionDate=17-Jul-2002, LatestRevisionNote="Re-released for DXP Platform.", Publisher="Altium Limited", Supplier 1=Mouser
TEST-PINS: library part "Header 5", "Header, 5-Pin", Supplier Part Number 1=571-87984-5, LatestRevisionDate=17-Jul-2002, LatestRevisionNote="Re-released for DXP Platform.", Publisher="Altium Limited", Supplier 1=Mouser

## Via types
v1: diameter 0.762, hole 0.406, Top Layer to Bottom Layer, 55 vias

## Nets (pads, with @x,y where several pads share a name; then routed paths per layer and width w, separated by ;. In a path a pad name is that pad's centre, name@x,y a point inside that pad or via, vN(x,y) a via of type N, cw(c..) or ccw(c..) an arc to the next point about the centre after c; other vN are vias at no path point)
5V: BLUETOOTH.5 C1.2 C9.1 CAMERA-SENSOR.4 J9.16 LCD.2 LM1084.2 MOTOR-DRIVER.9 R6.2 R13.2 SERVO-MOTOR.2 SPEED-SENSOR.1 TEST-PINS.3 ULTRASONIC.1 | length 5.7
  Top Layer w0.305: C9.1 v1(-52.422,-40.259)
  Bottom Layer w0.305: v1(-61.697,-16.547) R6.2 ; v1(-54.106,-36.562) R13.2 ; C1.2 v1(-13.03,-35.497)
12V: BYPASS-SWITCH.5 C2.1 C6.1 C7.1 D1.2 D3.2 D5.2 D7.2 D9.3 MOTOR-DRIVER.4 R1.2 R4.2 TEST-PINS.2 | length 9.7
  Bottom Layer w0.305: R4.2 -61.35,-9.229 -61.35,-8.277 v1(-61.341,-8.269) ; R1.2 v1(-29.62,-8.599) ; D1.2 v1(-10.61,-12.587) ; D3.2 v1(-10.508,-18.302) ; D5.2 v1(-10.432,-24.093) ; D7.2 v1(-10.406,-29.859) ; v1(-10.279,-41.007) C2.1
+3.3V: J9.4 J9.8 | length 6
  Bottom Layer w0.305: J9.4 -49.67,-51.93 -46.85,-51.93 J9.8
GND: 5V.2 12V.2 BATTERY.2 BLUETOOTH.4 C1.1 C2.2 C3.2 C5.1 C6.2 C7.2 C8.2 C9.2 CAMERA-SENSOR.5 D2.1 D4.1 D6.1 D8.1 J2.14 J6.14 J9.12 J9.14 JUMP-A.1 JUMP-B.1 LCD.1 LEFT-ACC.2 LEFT-REV.2 LT1370CR.4 MOTOR-DRIVER.8 POWER.2 R2.1 R3.1 R7.1 R8.1 R14.1 RESISTOR-ARRAY.1 RIGHT-ACC.2 RIGHT-REV.2 SERVO-MOTOR.1 SPEED-SENSOR.3 TEST-PINS.4 ULTRASONIC.4 | length 32.1
  Top Layer w0.305: v1(-67.111,-22.567) -67.102,-22.558 -67.102,-21.607 LEFT-ACC.2 ; v1(-66.907,-9.994) POWER.2 ; v1(-66.882,-15.963) 5V.2 ; v1(-66.857,-27.901) LEFT-REV.2 ; v1(-66.857,-12.966) 12V.2 ; v1(-66.577,-41.719) RIGHT-REV.2 ; RIGHT-ACC.2 v1(-66.552,-34.71) ; v1(-59.363,-33.579) C8.2 ; v1(-59.338,-40.259) C9.2 ; LT1370CR.4 v1(-40.766,-14.3)
  Bottom Layer w0.305: C5.1 v1(-58.895,-19.8) ; R14.1 v1(-51.427,-37.301) ; R3.1 v1(-26.92,-14.847) ; R2.1 v1(-26.92,-11.647) ; R8.1 -12.963,-10.474 -12.963,-10.052 -12.548,-9.637 v1(-12.548,-9.513) ; R7.1 v1(-13.31,-6.313) ; D2.1 v1(-13.263,-15.457) ; D4.1 v1(-13.183,-21.273) ; D6.1 v1(-13.132,-27.014) ; D8.1 v1(-13.056,-32.729) ; v1(-12.979,-41.007) C2.2 ; C1.1 v1(-10.33,-35.497)
Net5V_1: 5V.1 R6.1 | length 14
  Top Layer w0.305: 5V.1 -64.182,-14.305 -63.087,-13.21 -63.087,-10.909 -62.685,-10.507 -62.117,-10.507 -58.997,-13.627 v1(-58.997,-16.552)
  Bottom Layer w0.305: v1(-58.997,-16.552) R6.1
Net12V_1: 12V.1 R4.1 | length 12.5
  Top Layer w0.305: v1(-64.966,-10.25) -64.966,-10.373 -64.554,-10.786 -64.554,-11.21 12V.1
  Bottom Layer w0.305: v1(-64.966,-10.25) -64.966,-11.109 -62.373,-13.702 -61.02,-13.702 -60.805,-13.487 -60.805,-11.684 -59.047,-9.927 R4.1
NetBYPASS-SWITCH_1: BYPASS-SWITCH.1 MAIN-SWITCH.2 | length 53.8
  Top Layer w0.305: BYPASS-SWITCH.1 -73.165,-49.823 -73.165,-41.817 -68.265,-36.917 -68.265,-1.506 MAIN-SWITCH.2
NetBYPASS-SWITCH_2: BYPASS-SWITCH.2 C3.1 L1.1 LT1370CR.3 LT1370CR.7 | length 91.1
  Top Layer w0.305: LT1370CR.7 -44.024,-10.49 -44.49,-10.955 -44.651,-10.955 -44.829,-11.134 -44.829,-14.926 -44.651,-15.105 -44.49,-15.105 -44.024,-15.57 LT1370CR.3 -41.774,-15.57 -41.309,-16.035 -41.148,-16.035 -40.074,-17.109 -40.074,-22.653 C3.1 ; v1(-29.481,-24.587) -29.481,-28.304 L1.1
  Bottom Layer w0.305: BYPASS-SWITCH.2 -76.606,-46.812 -76.606,-35.006 -68.816,-27.215 -44.637,-27.215 C3.1 v1(-29.481,-24.587)
NetBYPASS-SWITCH_3: BYPASS-SWITCH.3 BYPASS-SWITCH.6 | length 3.6
  Bottom Layer w0.305: BYPASS-SWITCH.3 BYPASS-SWITCH.6
NetBYPASS-SWITCH_4: BYPASS-SWITCH.4 C8.1 LM1084.3 | length 37.3
  Top Layer w0.305: C8.1 -54.051,-33.574 -52.457,-33.574 v1@-52.453,-33.579 ; v1(-52.444,-33.57) v1@-52.453,-33.579 ; v1(-49.128,-36.466) -52.444,-36.466 v1@-52.453,-33.579
  Bottom Layer w0.305: BYPASS-SWITCH.4 -56.913,-33.57 v1(-52.444,-33.57) ; v1(-49.128,-36.466) LM1084.3
NetC4_1: C4.1 R3.2 | length 36
  Bottom Layer w0.305: C4.1 -61.646,-17.836 -59.888,-16.078 -59.888,-14.25 -59.673,-14.034 -45.582,-14.034 -44.109,-15.508 -30.018,-15.508 -29.62,-15.905 R3.2
NetC4_2: C4.2 C5.2 LT1370CR.1 | length 26.4
  Top Layer w0.305: LT1370CR.1 -42.891,-18.101 v1(-40.76,-18.101)
  Bottom Layer w0.305: C5.2 -61.595,-20.858 -60.384,-19.647 -60.157,-19.647 -58.946,-18.436 C4.2 -58.946,-17.836 -57.256,-16.146 -42.716,-16.146 v1(-40.76,-18.101)
NetD1_1: D1.1 D2.2 LEFT-MOTOR.1 MOTOR-DRIVER.2 | length 79.5
  Bottom Layer w0.305: LEFT-MOTOR.1 -63.096,-21.488 -62.271,-22.313 -45.413,-22.313 -43.156,-20.055 -27.398,-20.055 -24.479,-17.136 ; MOTOR-DRIVER.2 -20.664,-18.86 -23.856,-18.86 -24.479,-18.237 -24.479,-17.136 ; D2.2 -10.563,-16.515 -11.698,-15.38 -12.175,-15.38 -13.31,-14.245 D1.1 -13.576,-14.211 -24.295,-14.211 -24.479,-14.394 -24.479,-17.136
NetD3_1: D3.1 D4.2 LEFT-MOTOR.2 MOTOR-DRIVER.3 | length 81.6
  Bottom Layer w0.305: LEFT-MOTOR.2 -71.797,-23.689 -45.497,-23.689 -43.82,-22.013 -24.038,-22.013 -23.425,-21.4 -22.982,-21.4 -21.939,-20.357 -13.606,-20.357 D3.1@-13.208,-19.96 ; MOTOR-DRIVER.3 -21.094,-15.481 -17.087,-15.481 -13.208,-19.36 D3.1 D3.1@-13.208,-19.96 ; D4.2 -10.483,-22.331 -11.668,-21.145 -12.022,-21.145 D3.1@-13.208,-19.96
NetD5_1: D5.1 D6.2 MOTOR-DRIVER.13 RIGHT-MOTOR.1 | length 71.8
  Bottom Layer w0.305: RIGHT-MOTOR.1 -69.52,-30.505 MOTOR-DRIVER.13 -14.226,-30.505 -13.401,-29.68 -11.44,-29.68 -10.432,-28.672 D6.2 -10.432,-28.072 -11.592,-26.911 -11.971,-26.911 -13.132,-25.751 D5.1
NetD7_1: D7.1 D8.2 MOTOR-DRIVER.14 RIGHT-MOTOR.2 | length 70.9
  Bottom Layer w0.305: RIGHT-MOTOR.2 -67.957,-34.022 -65.905,-34.022 -64.736,-32.853 -64.736,-31.891 -64.129,-31.285 -41.297,-31.285 -40.806,-31.775 MOTOR-DRIVER.14 -13.504,-31.775 D7.1@-13.106,-31.378 ; D7.1 D7.1@-13.106,-31.378 ; D8.2 -10.356,-33.787 -11.491,-32.652 -11.971,-32.652 -13.106,-31.517 D7.1@-13.106,-31.378
NetD9_1: D9.1 L1.2 LT1370CR.5 | length 57.8
  Top Layer w0.305: D9.1 -55.305,-27.372 ; LT1370CR.5 -41.774,-13.03 -41.309,-12.565 -41.148,-12.565 -40.97,-12.386 -40.97,-9.864 -41.148,-9.685 -44.651,-9.685 -45.713,-10.748 -45.713,-22.497 -44.029,-24.181 -44.029,-24.993 -46.408,-27.372 -55.305,-27.372 ; L1.2 -38.744,-27.982 -54.695,-27.982 -55.305,-27.372
NetJUMP-A_2: JUMP-A.2 MOTOR-DRIVER.1 R7.2 | length 19.9
  Top Layer w0.305: MOTOR-DRIVER.1 -22.821,-14.668 -22.821,-9.766 JUMP-A.2
  Bottom Layer w0.305: JUMP-A.2 -20.611,-9.716 -13.721,-9.716 -12.832,-8.827 -11.466,-8.827 -10.61,-7.971 R7.2
NetJUMP-B_2: JUMP-B.2 MOTOR-DRIVER.15 R8.2 | length 38.7
  Top Layer w0.305: MOTOR-DRIVER.15 -18.117,-33.045 -16.827,-31.755 -16.827,-9.894 ; JUMP-B.2 -16.827,-9.894 ; v1(-10.66,-9.516) -11.343,-10.199 -16.217,-10.199 -16.522,-9.894 -16.827,-9.894
  Bottom Layer w0.305: R8.2 v1(-10.66,-9.516)
NetLEFT-ACC_1: LEFT-ACC.1 R9.2 | length 6
  Top Layer w0.305: v1(-65.224,-24.807) -64.402,-23.985 -64.402,-21.607 LEFT-ACC.1
  Bottom Layer w0.305: R9.2 -66.523,-25.456 -65.961,-24.894 -65.311,-24.894 v1(-65.224,-24.807)
NetLEFT-REV_1: LEFT-REV.1 R10.2 | length 4.4
  Top Layer w0.305: v1(-65.015,-27.901) -65.015,-27.777 -64.554,-27.316 -64.554,-26.534 LEFT-REV.1
  Bottom Layer w0.305: R10.2 -66.556,-29.012 -66.158,-28.614 -65.728,-28.614 v1(-65.015,-27.901)
NetLM1084_1: LM1084.1 R13.1 R14.2 | length 13.9
  Bottom Layer w0.305: R14.2 -53.74,-39.046 -53.74,-39.888 -53.561,-40.066 -53.13,-40.066 -52.927,-35.78 -51.803,-35.78 -51.406,-35.382 R13.1 -51.406,-34.904 -50.553,-34.052 -47.357,-34.052 LM1084.1
NetLT1370CR_2: LT1370CR.2 R1.1 R2.2 | length 29.4
  Top Layer w0.305: v1(-45.027,-16.831) -42.908,-16.831 LT1370CR.2
  Bottom Layer w0.305: v1(-45.027,-16.831) -42.261,-19.598 -31.182,-19.598 -28.765,-17.181 -28.765,-14.16 -29.62,-13.305 R2.2 -29.62,-12.705 -28.396,-11.481 -28.144,-11.481 -26.92,-10.257 R1.1
NetPOWER_1: POWER.1 R5.1 | length 12.1
  Top Layer w0.305: POWER.1 v1(-64.207,-7.306)
  Bottom Layer w0.305: v1(-64.207,-7.306) -59.537,-7.306 -58.193,-8.65 -58.193,-10.603 -58.599,-11.009 -58.599,-12.15 R5.1
NetR11_2: R11.2 RIGHT-ACC.1 | length 7
  Top Layer w0.305: v1(-65.627,-31.513) -65.627,-33.993 -63.852,-35.768 RIGHT-ACC.1
  Bottom Layer w0.305: R11.2 -66.581,-32.568 -65.627,-31.614 v1(-65.627,-31.513)
NetR12_2: R12.2 RIGHT-REV.1 | length 5.2
  Top Layer w0.305: v1(-65.068,-39.502) -64.981,-39.59 -64.348,-39.59 -63.877,-40.061 RIGHT-REV.1
  Bottom Layer w0.305: R12.2 -66.581,-36.927 -65.068,-38.44 v1(-65.068,-39.502)
P5V_USB: J9.10
PTA1: J1.2 MOTOR-DRIVER.5 R9.1 RESISTOR-ARRAY.7 | length 134.9
  Top Layer w0.305: v1(-63.011,-24.401) v1@-62.998,-24.413 ; v1(-62.985,-23.004) -62.998,-23.016 v1@-62.998,-24.413 ; RESISTOR-ARRAY.7 -42.05,-44.513 -42.05,-48.728 -42.991,-49.67 -46.188,-49.67 -47.13,-50.611 -47.13,-56.941 -47.625,-57.437 -47.625,-58.319 -47.841,-58.535 -53.193,-58.535 -54.241,-57.487 -54.241,-57.043 -63.025,-48.26 -63.907,-48.26 -64.123,-48.044 -64.123,-42.437 -62.997,-41.311 -62.997,-24.438 -62.985,-24.426 v1@-62.998,-24.413 ; MOTOR-DRIVER.5 -19.851,-16.777 -19.851,-8.314 -17.784,-6.247 -16.865,-6.247 -16.65,-6.032 -16.65,-3.67 J1.2
  Bottom Layer w0.305: R9.1 -63.823,-25.456 -63.239,-24.872 v1@-63.239,-24.629 ; v1(-63.011,-24.401) v1@-63.239,-24.629 ; v1@-62.985,-24.426 -62.988,-24.428 v1@-63.239,-24.629 ; v1(-62.985,-23.004) -45.457,-23.004 -44.01,-21.556 -24.629,-21.556 MOTOR-DRIVER.5
PTA2: J1.4 MOTOR-DRIVER.7 R10.1 RESISTOR-ARRAY.6 | length 81.3
  Top Layer w0.305: RESISTOR-ARRAY.6 -34.385,-39.389 v1(-34.385,-29.15) ; MOTOR-DRIVER.7 -24.474,-21.831 -24.474,-8.292 -21.73,-5.548 -21.73,-3.95 J1.4
  Bottom Layer w0.305: R10.1 -63.847,-29.303 -38.373,-29.303 ; v1(-34.385,-29.15) -37.358,-29.15 -37.511,-29.303 -38.373,-29.303 ; MOTOR-DRIVER.7 -26.378,-25.845 -34.914,-25.845 -38.373,-29.303
PTA4: J1.10 SERVO-MOTOR.3 | length 86
  Top Layer w0.305: v1(-58.185,-6.519) -58.185,-29.185 -56.325,-31.045 -56.325,-53.911 SERVO-MOTOR.3
  Bottom Layer w0.305: v1(-58.185,-6.519) -30.321,-6.519 -29.35,-5.548 -29.35,-3.95 J1.10
PTA5: CAMERA-SENSOR.3 J1.12 | length 68.8
  Top Layer w0.305: CAMERA-SENSOR.3 -38.087,-51.93 -37.632,-51.93 -36.69,-50.989 -36.69,-32.853 -35.09,-31.253 -35.09,-22.48 -39.029,-18.541 -39.029,-8.094 -37.148,-6.213 -37.148,-2.529 -36.028,-1.41 -31.61,-1.41 J1.12
PTA12: J1.8 MOTOR-DRIVER.12 R12.1 RESISTOR-ARRAY.4 | length 97.3
  Top Layer w0.305: RESISTOR-ARRAY.4 -28.79,-41.898 -25.242,-41.898 -24.167,-40.823 -24.167,-33.788 -24.474,-33.482 -24.474,-32.608 -23.425,-31.56 -20.664,-31.56 MOTOR-DRIVER.12 -21.094,-26.48 -23.856,-26.48 -24.931,-25.405 -24.931,-6.209 -24.27,-5.548 -24.27,-3.67 J1.8
  Bottom Layer w0.305: R12.1 -63.881,-36.327 -59.754,-32.199 -45.684,-32.199 -41.517,-36.366 -41.517,-40.823 -40.899,-41.441 -31.357,-41.441 RESISTOR-ARRAY.4
PTA13: J2.2 J6.2 | length 4.2
  Top Layer w0.305: J2.2 -39.357,-2.527 -39.357,1.664 J6.2
PTA16: J2.9 J6.9 | length 10.2
  Top Layer w0.305: J2.9 -48.374,-3.924 -48.374,3.086 J6.9
PTA17: J2.11 J6.11 | length 10.2
  Top Layer w0.305: J2.11 -50.914,-3.924 -50.914,3.086 J6.11
PTB0: J10.2 LEFT-PORT2.1 | length 25.2
  Top Layer w0.305: J10.2 -31.61,-49.67 -31.61,-47.308 -30.06,-45.758 -14.643,-45.758 LEFT-PORT2.1
PTB1: J10.4 LEFT-PORT1.10 | length 22.1
  Top Layer w0.305: J10.4 -27.94,-50.94 -25.088,-53.792 v1(-25.088,-53.915)
  Bottom Layer w0.305: v1(-25.088,-53.915) -22.958,-56.046 -19.45,-56.046 -18.402,-57.094 -18.402,-57.537 -17.353,-58.586 -13.939,-58.586 -13.322,-57.968 -13.322,-56.476 LEFT-PORT1.10
PTB2: J10.6 LEFT-PORT1.8 | length 20.4
  Top Layer w0.305: J10.6 -23.99,-49.39 -23.99,-47.792 -22.871,-46.672 -17.122,-46.672 -14.376,-49.419 LEFT-PORT1.8
PTB3: J10.8 LEFT-PORT1.6 | length 14.4
  Top Layer w0.305: J10.8 -22.86,-50.821 -20.511,-53.17 -20.511,-57.968 -19.893,-58.586 -19.019,-58.586 -17.971,-57.537 -17.971,-56.953 -17.145,-56.127 -17.145,-55.22 LEFT-PORT1.6
PTB8: J9.1 ULTRASONIC.2 | length 82.8
  Bottom Layer w0.305: J9.1 -46.978,-41.898 -10.2,-41.898 -8.097,-39.795 -8.097,-9.012 ULTRASONIC.2
PTB9: J9.3 LEFT-PORT2.8 | length 49
  Bottom Layer w0.305: J9.3 -46.367,-43.827 -6.414,-43.827 LEFT-PORT2.8
PTB10: J9.5 LEFT-PORT2.6 | length 43.5
  Bottom Layer w0.305: J9.5 -44.284,-44.284 -8.497,-44.284 LEFT-PORT2.6
PTB11: J9.7 LEFT-PORT2.4 | length 38.1
  Bottom Layer w0.305: J9.7 -43.218,-45.758 -13.595,-45.758 -12.502,-46.851 -10.58,-46.851 LEFT-PORT2.4
PTC0: BLUETOOTH.3 J1.3 | length 8.7
  Top Layer w0.305: J1.3 -19.19,-3.95 -19.19,1.938 -18.415,2.712 BLUETOOTH.3
PTC1: CAMERA-SENSOR.1 J10.12 | length 33.7
  Bottom Layer w0.305: CAMERA-SENSOR.1 -44.467,-53.23 -20.21,-53.23 J10.12
PTC2: J10.10 SPEED-SENSOR.2 | length 52.1
  Bottom Layer w0.305: SPEED-SENSOR.2 -32.881,-58.535 -49.593,-58.535 -49.772,-58.356 -49.772,-56.604 -45.94,-52.772 -22.292,-52.772 J10.10
PTC3: BLUETOOTH.2 J1.5 | length 8.8
  Top Layer w0.305: J1.5 -22.86,-4.081 -21.73,-3.135 -21.514,-2.919 -21.514,-2.136 -20.955,-1.577 BLUETOOTH.2
PTC4: BLUETOOTH.6 J1.7 | length 17.9
  Bottom Layer w0.305: J1.7 -23.99,-3.67 -17.312,-3.67 -10.795,2.847 BLUETOOTH.6
PTC5: CAMERA-SENSOR.2 J1.9 | length 76.5
  Top Layer w0.305: CAMERA-SENSOR.2 -45.122,-58.535 -38.12,-58.535 -33.897,-54.312 -33.897,-29.632 -33.699,-29.434 -33.699,-20.871 -38.572,-15.999 -38.572,-8.284 -36.69,-6.402 -36.69,-4.612 -36.028,-3.95 -29.07,-3.95 J1.9
PTC6: J1.11 MOTOR-DRIVER.6 RESISTOR-ARRAY.3 | length 57.2
  Top Layer w0.305: J1.11 -30.413,-5.147 -30.413,-27.153 v1@-30.48,-27.22 ; v1(-30.346,-27.22) v1@-30.48,-27.22 ; RESISTOR-ARRAY.3 -30.346,-37.802 -30.346,-27.354 v1@-30.48,-27.22
  Bottom Layer w0.305: v1(-30.346,-27.22) -28.546,-29.02 -22.982,-29.02 -22.142,-28.181 -18.332,-28.181 -17.284,-27.132 -17.284,-22.67 MOTOR-DRIVER.6
PTC7: BLUETOOTH.1 J1.1 | length 19.2
  Bottom Layer w0.305: BLUETOOTH.1 -26.53,-0.165 -26.53,-5.548 -25.868,-6.21 -18.91,-6.21 J1.1
PTC8: J1.14 LCD.4 | length 8
  Bottom Layer w0.305: J1.14 -32.868,-2.54 -27.457,2.87 LCD.4
PTC9: J1.16 LCD.3 | length 8
  Bottom Layer w0.305: J1.16 -35.408,-2.54 -29.997,2.87 LCD.3
PTC10: J1.13 MOTOR-DRIVER.11 RESISTOR-ARRAY.2 | length 54.9
  Top Layer w0.305: J1.13 -31.032,-7.068 -31.032,-37.763 -29.247,-39.547 -29.247,-40.392 -28.199,-41.441 -26.277,-41.441 RESISTOR-ARRAY.2 -25.222,-29.769 MOTOR-DRIVER.11
PTC11: J1.15 LEFT-PORT1.1 | length 60.3
  Top Layer w0.305: J1.15 -31.787,-8.853 -31.787,-40.823 -32.068,-41.103 -32.068,-50.811 -27.43,-55.448 -24.079,-55.448 LEFT-PORT1.1
PTC12: J2.1 J6.1 | length 10.2
  Top Layer w0.305: J2.1 -38.214,-3.924 -38.214,3.086 J6.1
PTC13: J2.3 J6.3 | length 10.2
  Top Layer w0.305: J2.3 -40.754,-3.924 -40.754,3.086 J6.3
PTC16: J2.5 J6.5 | length 10.2
  Top Layer w0.305: J2.5 -43.294,-3.924 -43.294,3.086 J6.5
PTC17: J2.7 J6.7 | length 10.2
  Top Layer w0.305: J2.7 -45.834,-3.924 -45.834,3.086 J6.7
PTD0: J2.6 J6.6 | length 4.2
  Top Layer w0.305: J2.6 -44.437,-2.527 -44.437,1.664 J6.6
PTD1: J2.12 J6.12 | length 4.2
  Top Layer w0.305: J2.12 -52.057,-2.527 -52.057,1.664 J6.12
PTD2: J2.8 J6.8 | length 4.2
  Top Layer w0.305: J2.8 -46.977,-2.527 -46.977,1.664 J6.8
PTD3: J2.10 J6.10 | length 4.2
  Top Layer w0.305: J2.10 -49.517,-2.527 -49.517,1.664 J6.10
PTD4: J1.6 MOTOR-DRIVER.10 R11.1 RESISTOR-ARRAY.5 | length 107.8
  Top Layer w0.305: RESISTOR-ARRAY.5 v1(-32.842,-26.53) ; J1.6 -22.86,-2.426 -22.01,-1.576 -22.01,3.307 -21.392,3.925 -17.978,3.925 -16.93,2.877 -16.93,-1.792 -16.193,-2.529 -16.193,-6.221 -17.578,-7.607 -18.496,-7.607 -19.394,-8.504 -19.394,-25.641 MOTOR-DRIVER.10
  Bottom Layer w0.305: R11.1 -63.881,-32.568 -63.483,-32.17 -60.371,-32.17 -59.943,-31.742 -41.486,-31.742 RESISTOR-ARRAY.5 ; v1(-32.842,-26.53) -32.838,-26.534 -18.5,-26.534 MOTOR-DRIVER.10
PTD5: J2.4 J6.4 | length 4.2
  Top Layer w0.305: J2.4 -41.897,-2.527 -41.897,1.664 J6.4
PTD6: J2.17 J6.17 | length 10.2
  Top Layer w0.305: J2.17 -58.534,-3.924 -58.534,3.086 J6.17
PTD7: J2.19 J6.19 | length 10.2
  Top Layer w0.305: J2.19 -63.36,-3.95 -63.36,3.061 J6.19
PTE0: J2.18 J6.18 | length 4.2
  Top Layer w0.305: J2.18 -59.677,-2.527 -59.677,1.664 J6.18
PTE1: J2.20 J6.20 | length 4.2
  Top Layer w0.305: J2.20 -62.217,-2.527 -62.217,1.664 J6.20
PTE2: J9.9 LEFT-PORT2.2 | length 52.8
  Bottom Layer w0.305: J9.9 -41.77,-49.67 -37.632,-49.67 -36.69,-50.611 -36.69,-51.268 -36.028,-51.93 -35.092,-51.93 -31.647,-48.486 -31.647,-47.345 -31.432,-47.13 -17.289,-47.13 -14.113,-50.305 -7.462,-50.305 -5.93,-48.773 -5.93,-47.899 -6.978,-46.851 -7.422,-46.851 -8.47,-45.803 -8.47,-45.359 -9.088,-44.741 -11.01,-44.741 LEFT-PORT2.2
PTE3: LEFT-PORT2.7
PTE4: J9.13 LEFT-PORT2.5 | length 34.6
  Bottom Layer w0.305: J9.13 -37.373,-48.987 -36.864,-49.394 -35.096,-49.394 -32.374,-46.672 -17.099,-46.672 -13.924,-49.848 -8.497,-49.848 LEFT-PORT2.5
PTE5: J9.15 LEFT-PORT2.3 | length 28.6
  Bottom Layer w0.305: J9.15 -33.515,-46.215 -16.117,-46.215 -12.941,-49.391 -10.58,-49.391 LEFT-PORT2.3
PTE20: J10.1 LEFT-PORT1.4 | length 20.3
  Top Layer w0.305: J10.1 -29.35,-47.13 -27.472,-47.13 -26.53,-48.071 -26.53,-51.268 -25.868,-51.93 -24.932,-51.93 -23.99,-50.989 -23.99,-50.332 -23.328,-49.67 -22.392,-49.67 -21.45,-50.611 -21.45,-51.585 -19.456,-53.578 LEFT-PORT1.4
PTE21: J10.3 LEFT-PORT1.2 | length 12.1
  Top Layer w0.305: J10.3 -29.07,-49.39 -29.07,-51.268 -25.347,-54.991 LEFT-PORT1.2
PTE22: J10.5 LEFT-PORT1.9 | length 22.7
  Top Layer w0.305: J10.5 -23.355,-46.215 -16.933,-46.215 -13.322,-49.827 -13.322,-56.046 LEFT-PORT1.9
PTE23: J10.7 LEFT-PORT1.7 | length 15.2
  Bottom Layer w0.305: J10.7 -21.45,-49.67 -17.312,-49.67 -15.862,-51.12 -15.862,-56.046 LEFT-PORT1.7
PTE29: J10.9 LEFT-PORT1.5 | length 14.9
  Top Layer w0.305: J10.9 -19.19,-47.13 -17.312,-47.13 -15.862,-48.58 -15.862,-56.476 LEFT-PORT1.5
PTE30: J10.11 LEFT-PORT1.3 | length 10.4
  Top Layer w0.305: LEFT-PORT1.3 -18.402,-56.476 -18.402,-54.554 -18.91,-54.045 -18.91,-49.39 J10.11
PTE31: J2.13 J6.13 | length 10.2
  Top Layer w0.305: J2.13 -55.74,-3.95 -55.74,3.061 J6.13
RESET/PTA20: J9.6 TEST-PINS.5 | length 18.4
  Bottom Layer w0.305: TEST-PINS.5 -55.41,-49.67 -49.39,-49.67 J9.6
SDA_PTD5: J9.2 ULTRASONIC.3 | length 87.4
  Top Layer w0.305: J9.2 -51.93,-49.39 -51.93,-47.446 -35.548,-31.063 -35.548,-22.67 -39.541,-18.676 v1(-39.541,-7.637)
  Bottom Layer w0.305: v1(-39.541,-7.637) -39.486,-7.581 -18.199,-7.581 -14.758,-4.14 ULTRASONIC.3
V_BAT: BATTERY.1 MAIN-SWITCH.1 R5.2 TEST-PINS.1 | length 60.4
  Top Layer w0.305: BATTERY.1 -74.498,-2.54 MAIN-SWITCH.1 ; TEST-PINS.1 -62.471,-46.57 -62.471,-24.83 -62.299,-24.659 -62.299,-18.073 -62.401,-17.971 v1(-62.401,-11.193)
  Bottom Layer w0.305: BATTERY.1 -65.593,-8.001 -62.547,-11.047 -62.255,-11.047 v1@-62.255,-11.193 ; v1(-62.401,-11.193) v1@-62.255,-11.193 ; v1@-62.11,-11.193 -61.875,-11.427 ; R5.2 -61.697,-11.606 -61.875,-11.427 ; v1@-62.255,-11.193 -62.255,-11.215 -62.043,-11.427 -61.875,-11.427
VREFH: J2.16 J6.16 | length 4.2
  Top Layer w0.305: J2.16 -57.137,-2.527 -57.137,1.664 J6.16
pads on no net: J2.15 J6.15 J9.11 LT1370CR.6 LT1370CR.8 RESISTOR-ARRAY.8 SCAVENGERS™.1 SPEED-SENSOR.4

## Polygon pours and split planes (outlines as drawn)
5V on 5V Plane (split plane): 225 vertices, not listed, extent -80.928,-60.449 -0.364,6.728
12V on 12V Plane (split plane): 225 vertices, not listed, extent -80.928,-60.449 -0.364,6.728
GND on Ground Plane (split plane): 225 vertices, not listed, extent -80.928,-60.449 -0.364,6.728

## Silkscreen, mask and mechanical layers (free items; w line width, h text height)
Top Overlay:
  drawing of 1840 lines, arcs and shapes, not listed

## Text inside footprints (layer, text, board x,y; h text height)
BYPASS-SWITCH: Top Overlay "6" at -68.047,-49.276 h1.27; Top Overlay "5" at -68.047,-51.816 h1.27; Top Overlay "2" at -77.191,-49.276 h1.27; Top Overlay "1" at -76.683,-51.816 h1.27
D9: Top Overlay "3" at -52.087,-29.435 h1.5; Top Overlay "1" at -56.917,-29.435 h1.5
LEFT-PORT1: Top Overlay "10" at -10.312,-55.499 h1.27; Top Overlay "9" at -10.312,-58.039 h1.27; Top Overlay "1" at -24.028,-58.039 h1.27; Top Overlay "2" at -24.536,-55.499 h1.27
LEFT-PORT2: Top Overlay "8" at -2.921,-46.304 h1.27; Top Overlay "7" at -2.921,-48.844 h1.27; Top Overlay "1" at -14.097,-48.844 h1.27; Top Overlay "2" at -14.605,-46.304 h1.27
MOTOR-DRIVER: Top Overlay "15" at -26.044,-32.095 h1.5 r270; Top Overlay "1" at -26.044,-15.035 h1.5 r270